# EAGLE board BigEasyDriver_GiantPanel_v16a (EAGLE 6.6.0), part 1 of 8
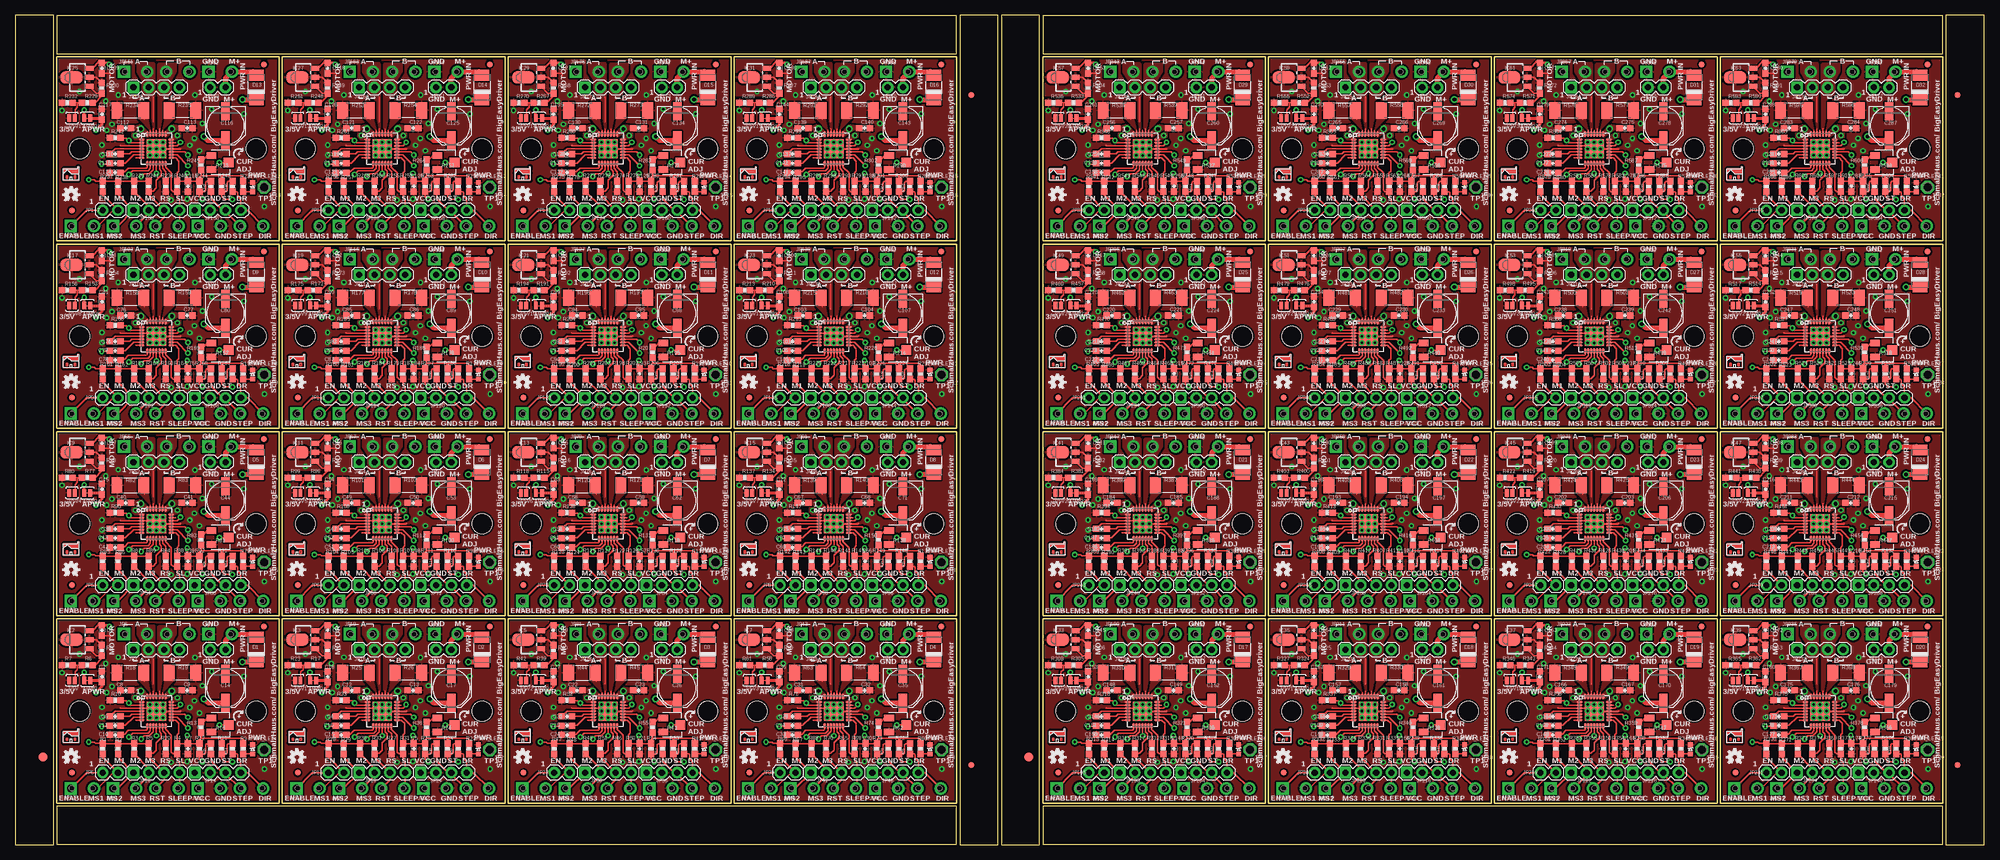
[diagram p0: board, top side]
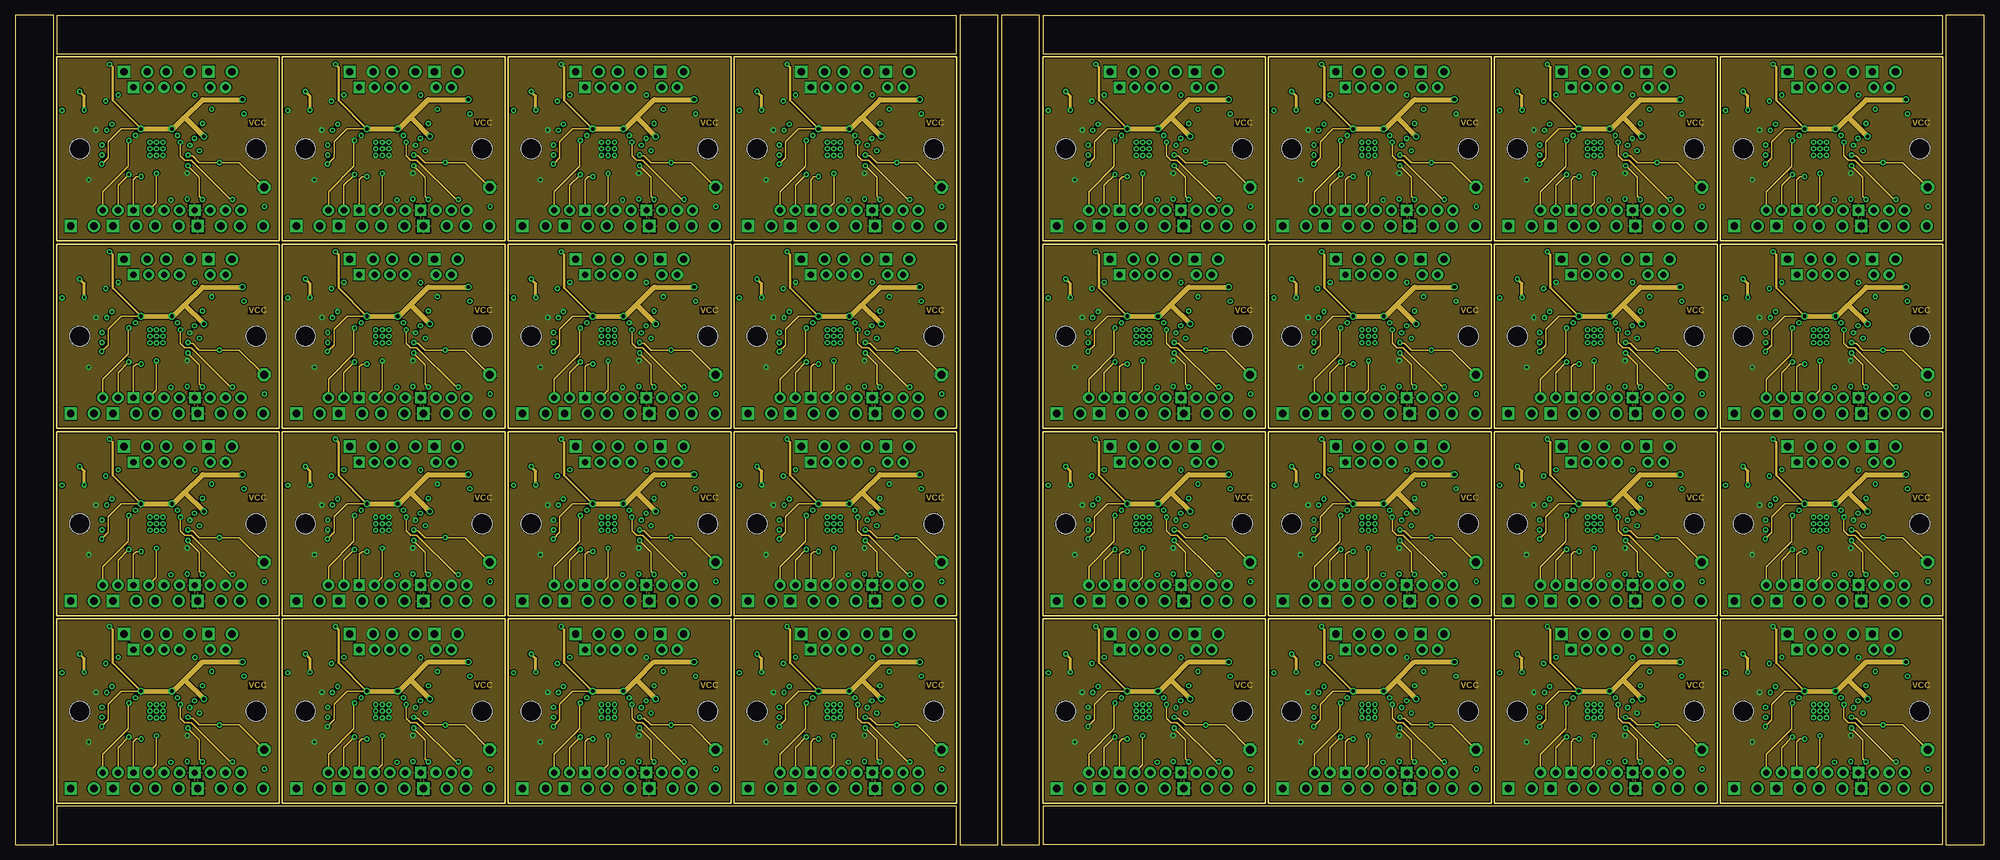
[diagram p1: board, inner layer VCC]
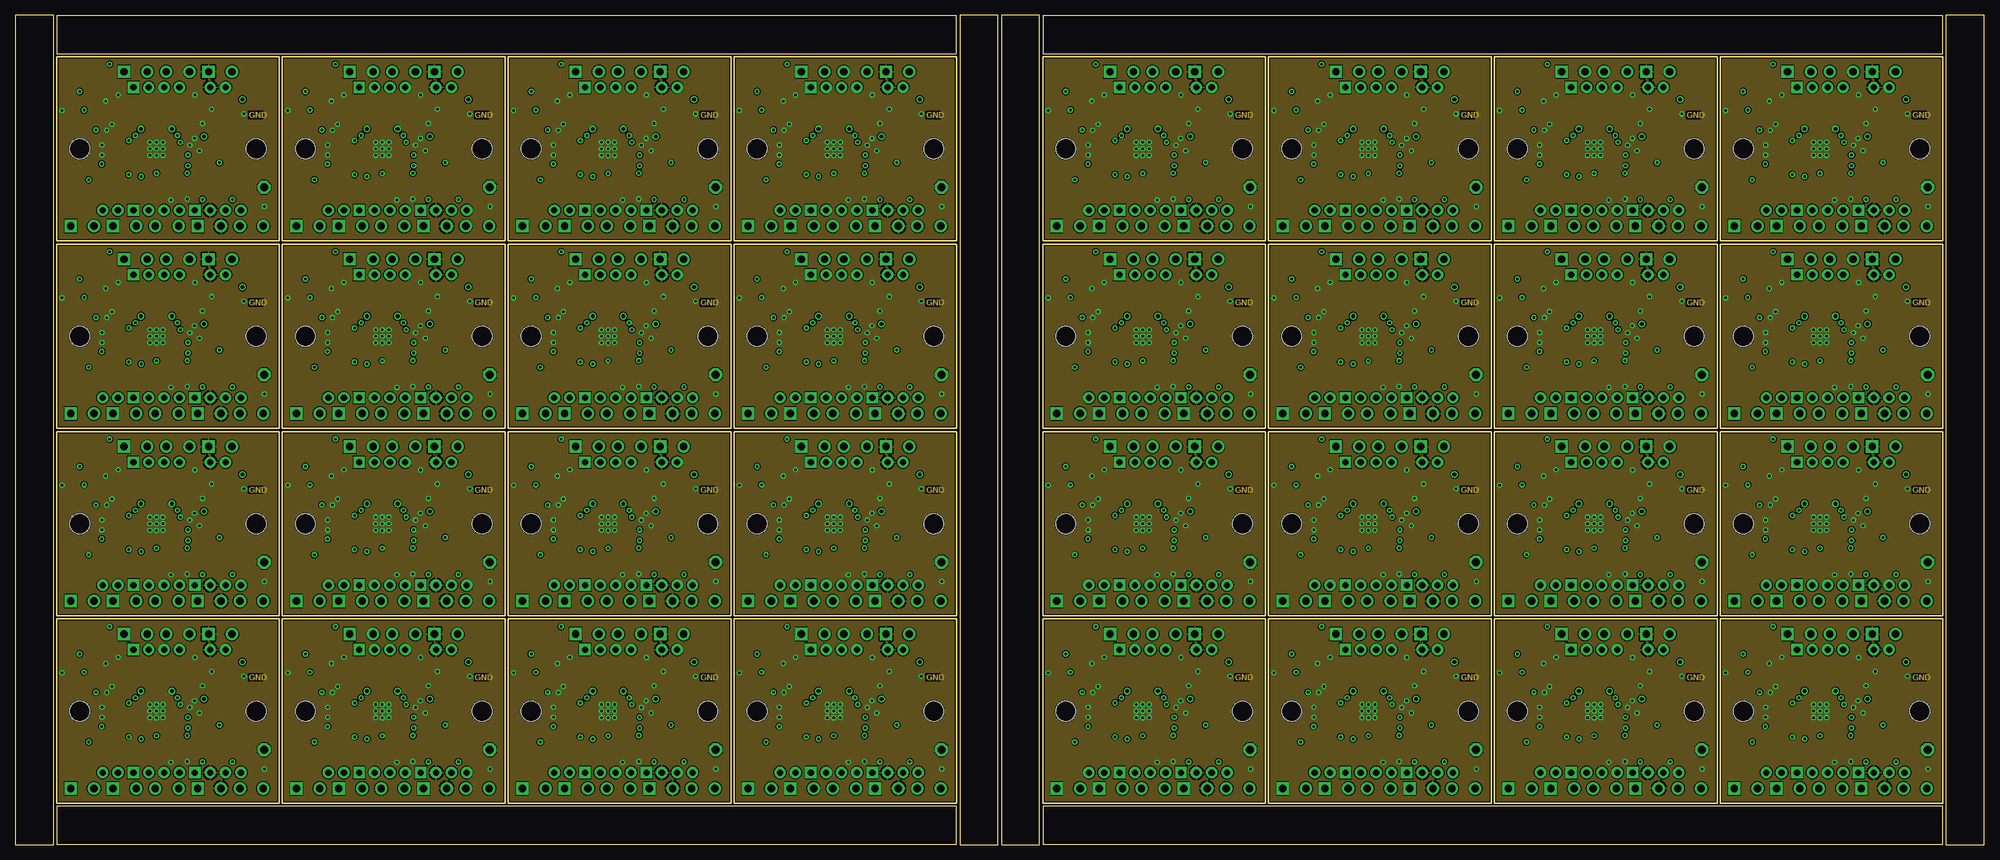
[diagram p2: board, inner layer GND]
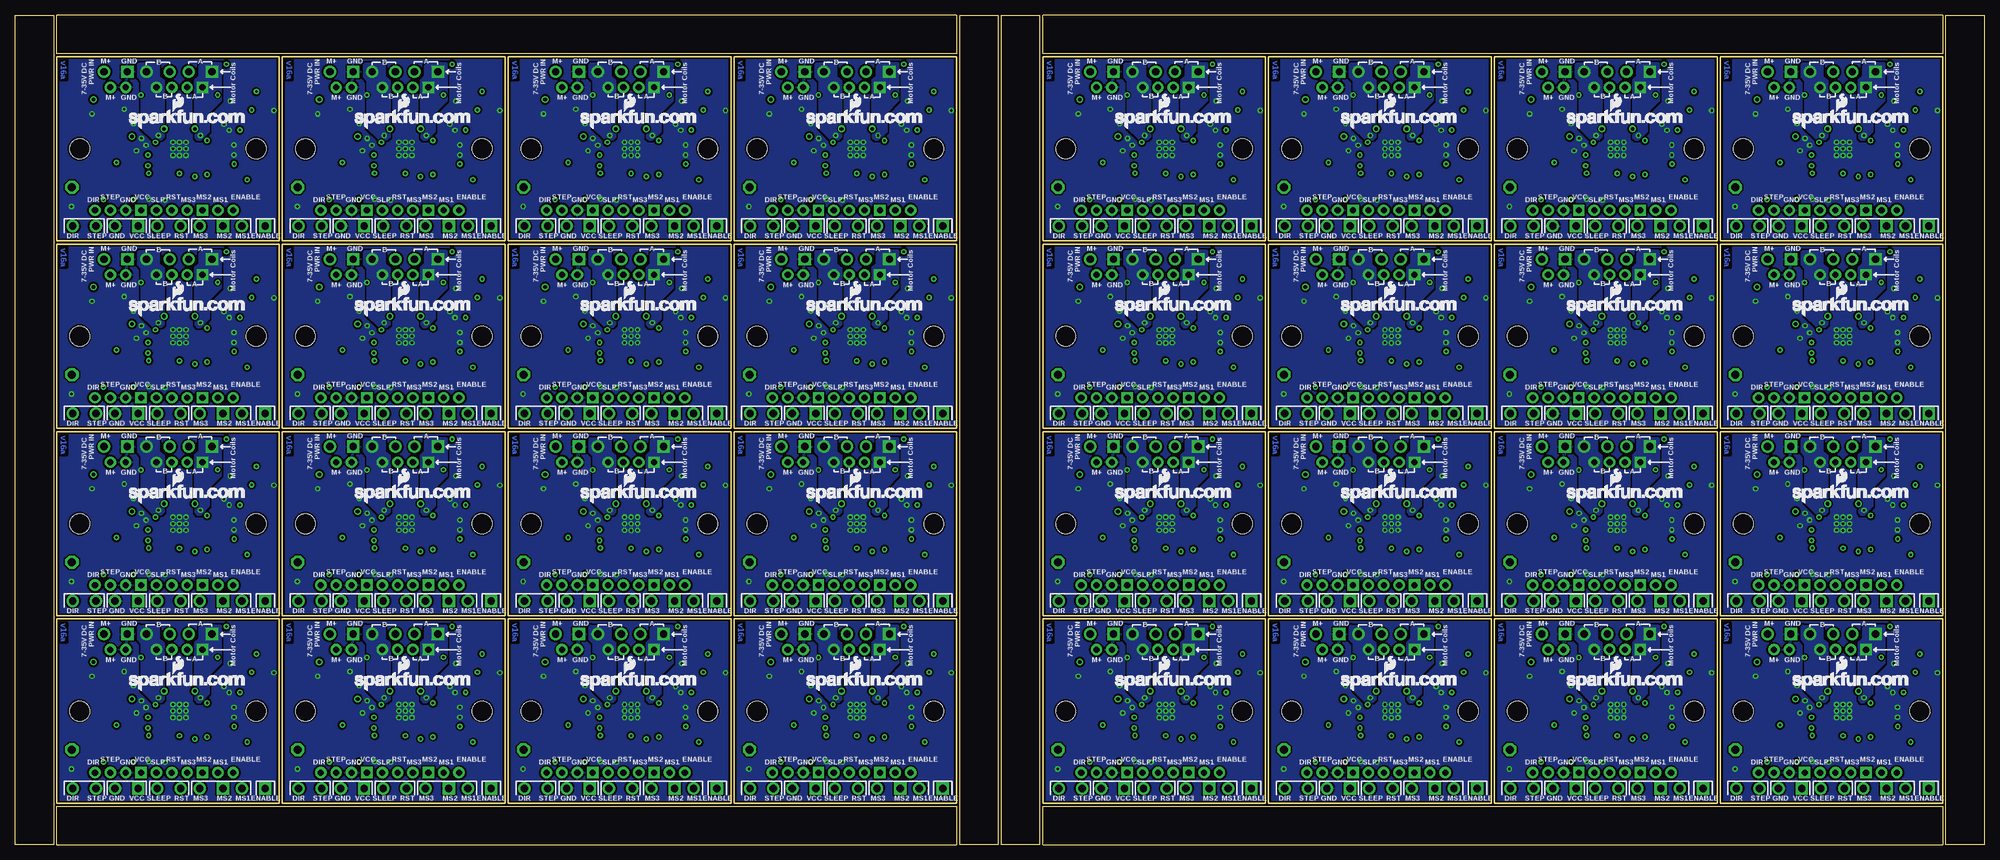
[diagram p3: board, bottom side, seen from below]

Size 325.63 x 137.16 mm. Coordinates in mm from the lower left corner, seen from the top.
Outline: 6.86,37.34 43.69,37.34 43.69,6.86 6.86,6.86 6.86,37.34
Outline: 44.2,37.34 81.03,37.34 81.03,6.86 44.2,6.86 44.2,37.34
Outline: 81.53,37.34 118.36,37.34 118.36,6.86 81.53,6.86 81.53,37.34
Outline: 118.87,37.34 155.7,37.34 155.7,6.86 118.87,6.86 118.87,37.34
Outline: 6.86,68.33 43.69,68.33 43.69,37.85 6.86,37.85 6.86,68.33
Outline: 44.2,68.33 81.03,68.33 81.03,37.85 44.2,37.85 44.2,68.33
Outline: 81.53,68.33 118.36,68.33 118.36,37.85 81.53,37.85 81.53,68.33
Outline: 118.87,68.33 155.7,68.33 155.7,37.85 118.87,37.85 118.87,68.33
Outline: 6.86,99.31 43.69,99.31 43.69,68.83 6.86,68.83 6.86,99.31
Outline: 44.2,99.31 81.03,99.31 81.03,68.83 44.2,68.83 44.2,99.31
Outline: 81.53,99.31 118.36,99.31 118.36,68.83 81.53,68.83 81.53,99.31
Outline: 118.87,99.31 155.7,99.31 155.7,68.83 118.87,68.83 118.87,99.31
Outline: 6.86,130.3 43.69,130.3 43.69,99.82 6.86,99.82 6.86,130.3
Outline: 44.2,130.3 81.03,130.3 81.03,99.82 44.2,99.82 44.2,130.3
Outline: 81.53,130.3 118.36,130.3 118.36,99.82 81.53,99.82 81.53,130.3
Outline: 118.87,130.3 155.7,130.3 155.7,99.82 118.87,99.82 118.87,130.3
Outline: 6.35,0 6.35,137.16 0,137.16 0,0 6.35,0
Outline: 6.86,6.35 6.86,0 155.7,0 155.7,6.35 6.86,6.35
Outline: 6.86,130.81 155.7,130.81 155.7,137.16 6.86,137.16 6.86,130.81
Outline: 156.21,137.16 156.21,0 162.56,0 162.56,137.16 156.21,137.16
Outline: 169.93,37.34 206.76,37.34 206.76,6.86 169.93,6.86 169.93,37.34
Outline: 207.26,37.34 244.09,37.34 244.09,6.86 207.26,6.86 207.26,37.34
Outline: 244.6,37.34 281.43,37.34 281.43,6.86 244.6,6.86 244.6,37.34
Outline: 281.94,37.34 318.77,37.34 318.77,6.86 281.94,6.86 281.94,37.34
Outline: 169.93,68.33 206.76,68.33 206.76,37.85 169.93,37.85 169.93,68.33
Outline: 207.26,68.33 244.09,68.33 244.09,37.85 207.26,37.85 207.26,68.33
Outline: 244.6,68.33 281.43,68.33 281.43,37.85 244.6,37.85 244.6,68.33
Outline: 281.94,68.33 318.77,68.33 318.77,37.85 281.94,37.85 281.94,68.33
Outline: 169.93,99.31 206.76,99.31 206.76,68.83 169.93,68.83 169.93,99.31
Outline: 207.26,99.31 244.09,99.31 244.09,68.83 207.26,68.83 207.26,99.31
Outline: 244.6,99.31 281.43,99.31 281.43,68.83 244.6,68.83 244.6,99.31
Outline: 281.94,99.31 318.77,99.31 318.77,68.83 281.94,68.83 281.94,99.31
Outline: 169.93,130.3 206.76,130.3 206.76,99.82 169.93,99.82 169.93,130.3
Outline: 207.26,130.3 244.09,130.3 244.09,99.82 207.26,99.82 207.26,130.3
Outline: 244.6,130.3 281.43,130.3 281.43,99.82 244.6,99.82 244.6,130.3
Outline: 281.94,130.3 318.77,130.3 318.77,99.82 281.94,99.82 281.94,130.3
Outline: 169.42,0 169.42,137.16 163.07,137.16 163.07,0 169.42,0
Outline: 169.93,6.35 169.93,0 318.77,0 318.77,6.35 169.93,6.35
Outline: 169.93,130.81 318.77,130.81 318.77,137.16 169.93,137.16 169.93,130.81
Outline: 319.28,137.16 319.28,0 325.63,0 325.63,137.16 319.28,137.16
Copper layers (1*2*15*16): Top 0.035mm / dielectric 1.5mm / VCC 0.035mm / dielectric 0.15mm / GND 0.035mm / dielectric 0.2mm / Bottom 0.035mm
Design rules "SparkFun-4-layer": minimum track width 6mil, minimum drill 13mil, track to track 6mil, track to pad 6mil, pad to pad 6mil, via to via 6mil, smd to smd 6mil, copper to edge 6mil, drill to drill 8mil, minimum pad ring 12mil, minimum via ring 10mil, stop-mask expansion 4mil, vias tented up to drill 20mil, thermal gap 12mil

## Footprints (pad centres in the part's own frame; a part is rotated, then mirrored left to right if it is on the bottom)
SJ_2S-NO = smd 0.635 x 1.27: 1 -0.45,0; 2 0.45,0
SJ_2S-TRACE = smd 0.635 x 1.27: 1 -0.508,0; 2 0.508,0
0603-CAP = smd 1.1 x 1: 1 -0.85,0; 2 0.85,0
PANASONIC_D = smd 3 x 1.4: + 2.4,0; - -2.4,0
DO-214AC = smd 1.8 x 2.4: A 2.025,0; C -2.025,0
FIDUCIAL-1.5X3 = smd 1.5 x 1.5: 1 0,0
FIDUCIAL-1X2 = smd 1 x 1: 1 0,0
QFN-28-5MM_ALT1 = smd 0.94 x 0.3: P$1 -2.44,1.5; P$2 -2.44,1; P$3 -2.44,0.5; P$4 -2.44,0; P$5 -2.44,-0.5; P$6 -2.44,-1; P$7 -2.44,-1.5; P$15 2.44,-1.5; P$16 2.44,-1; P$17 2.44,-0.5; P$18 2.44,0; P$19 2.44,0.5; P$20 2.44,1; P$21 2.44,1.5 | smd 0.3 x 0.94: P$8 -1.5,-2.44; P$9 -1,-2.44; P$10 -0.5,-2.44; P$11 0,-2.44; P$12 0.5,-2.44; P$13 1,-2.44; P$14 1.5,-2.44; P$22 1.5,2.44; P$23 1,2.44; P$24 0.5,2.44; P$25 0,2.44; P$26 -0.5,2.44; P$27 -1,2.44; P$28 -1.5,2.44 | smd 3.175 x 3.175: P$29 0,0
SCHMALZHAUS_SOT89 = smd 0.8 x 1.4: ADJ -1.499,-1.981; IN 1.499,-1.981; OUT 0,-1.98 | smd 2.032 x 3.65: OUT@1 0,0.94
1X02 = drill 1.016 pad 1.88: 1 0,0; 2 2.54,0
STAND-OFF = hole 3.302: 0,0
1X04 = drill 1.016 pad 1.88 square: 1 0,0 | drill 1.016 pad 1.88: 2 2.54,0; 3 5.08,0; 4 7.62,0
SCREWTERMINAL-3.5MM-4_LOCK = drill 1.2 pad 2.032 square: 1 -0.178,0 | drill 1.2 pad 2.032: 2 3.678,0; 3 6.822,0; 4 10.678,0
SCREWTERMINAL-3.5MM-2_LOCK = drill 1.2 pad 2.032 square: 1 -0.178,0 | drill 1.2 pad 2.032: 2 3.678,0
LED-0603 = smd 0.8 x 0.8: A 0,-0.75; C 0,0.75
0603-RES = smd 1.1 x 1: 1 -0.85,0; 2 0.85,0
TRIMPOT-3MM-2 = smd 1.092 x 1.6: 1 -1.155,-1.421; 3 1.155,-1.421 | smd 1.6 x 1.6: 2 0,1.421
R2010 = smd 1.8 x 2.7: 1 -2.2,0; 2 2.2,0
P1-13 = drill 1.321 pad 2.159 octagon: TP 0,0
PAD-0.008 = smd 0.203 x 0.203: P$1 0,0

## Placement (x,y rotation side)
3/5V  SOLDERJUMPERNO  [SJ_2S-NO]  9.4,27.18 180 top
3/5V1  SOLDERJUMPERNO  [SJ_2S-NO]  46.74,27.18 180 top
3/5V2  SOLDERJUMPERNO  [SJ_2S-NO]  84.07,27.18 180 top
3/5V3  SOLDERJUMPERNO  [SJ_2S-NO]  121.41,27.18 180 top
3/5V4  SOLDERJUMPERNO  [SJ_2S-NO]  9.4,58.17 180 top
3/5V5  SOLDERJUMPERNO  [SJ_2S-NO]  46.74,58.17 180 top
3/5V6  SOLDERJUMPERNO  [SJ_2S-NO]  84.07,58.17 180 top
3/5V7  SOLDERJUMPERNO  [SJ_2S-NO]  121.41,58.17 180 top
3/5V8  SOLDERJUMPERNO  [SJ_2S-NO]  9.4,89.15 180 top
3/5V9  SOLDERJUMPERNO  [SJ_2S-NO]  46.74,89.15 180 top
3/5V10  SOLDERJUMPERNO  [SJ_2S-NO]  84.07,89.15 180 top
3/5V11  SOLDERJUMPERNO  [SJ_2S-NO]  121.41,89.15 180 top
3/5V12  SOLDERJUMPERNO  [SJ_2S-NO]  9.4,120.14 180 top
3/5V13  SOLDERJUMPERNO  [SJ_2S-NO]  46.74,120.14 180 top
3/5V14  SOLDERJUMPERNO  [SJ_2S-NO]  84.07,120.14 180 top
3/5V15  SOLDERJUMPERNO  [SJ_2S-NO]  121.41,120.14 180 top
3/5V16  SOLDERJUMPERNO  [SJ_2S-NO]  172.47,27.18 180 top
3/5V17  SOLDERJUMPERNO  [SJ_2S-NO]  209.8,27.18 180 top
3/5V18  SOLDERJUMPERNO  [SJ_2S-NO]  247.14,27.18 180 top
3/5V19  SOLDERJUMPERNO  [SJ_2S-NO]  284.48,27.18 180 top
3/5V20  SOLDERJUMPERNO  [SJ_2S-NO]  172.47,58.17 180 top
3/5V21  SOLDERJUMPERNO  [SJ_2S-NO]  209.8,58.17 180 top
3/5V22  SOLDERJUMPERNO  [SJ_2S-NO]  247.14,58.17 180 top
3/5V23  SOLDERJUMPERNO  [SJ_2S-NO]  284.48,58.17 180 top
3/5V24  SOLDERJUMPERNO  [SJ_2S-NO]  172.47,89.15 180 top
3/5V25  SOLDERJUMPERNO  [SJ_2S-NO]  209.8,89.15 180 top
3/5V26  SOLDERJUMPERNO  [SJ_2S-NO]  247.14,89.15 180 top
3/5V27  SOLDERJUMPERNO  [SJ_2S-NO]  284.48,89.15 180 top
3/5V28  SOLDERJUMPERNO  [SJ_2S-NO]  172.47,120.14 180 top
3/5V29  SOLDERJUMPERNO  [SJ_2S-NO]  209.8,120.14 180 top
3/5V30  SOLDERJUMPERNO  [SJ_2S-NO]  247.14,120.14 180 top
3/5V31  SOLDERJUMPERNO  [SJ_2S-NO]  284.48,120.14 180 top
APWR  SOLDERJUMPERTRACE  [SJ_2S-TRACE]  11.94,27.18 0 top
APWR1  SOLDERJUMPERTRACE  [SJ_2S-TRACE]  49.28,27.18 0 top
APWR2  SOLDERJUMPERTRACE  [SJ_2S-TRACE]  86.61,27.18 0 top
APWR3  SOLDERJUMPERTRACE  [SJ_2S-TRACE]  123.95,27.18 0 top
APWR4  SOLDERJUMPERTRACE  [SJ_2S-TRACE]  11.94,58.17 0 top
APWR5  SOLDERJUMPERTRACE  [SJ_2S-TRACE]  49.28,58.17 0 top
APWR6  SOLDERJUMPERTRACE  [SJ_2S-TRACE]  86.61,58.17 0 top
APWR7  SOLDERJUMPERTRACE  [SJ_2S-TRACE]  123.95,58.17 0 top
APWR8  SOLDERJUMPERTRACE  [SJ_2S-TRACE]  11.94,89.15 0 top
APWR9  SOLDERJUMPERTRACE  [SJ_2S-TRACE]  49.28,89.15 0 top
APWR10  SOLDERJUMPERTRACE  [SJ_2S-TRACE]  86.61,89.15 0 top
APWR11  SOLDERJUMPERTRACE  [SJ_2S-TRACE]  123.95,89.15 0 top
APWR12  SOLDERJUMPERTRACE  [SJ_2S-TRACE]  11.94,120.14 0 top
APWR13  SOLDERJUMPERTRACE  [SJ_2S-TRACE]  49.28,120.14 0 top
APWR14  SOLDERJUMPERTRACE  [SJ_2S-TRACE]  86.61,120.14 0 top
APWR15  SOLDERJUMPERTRACE  [SJ_2S-TRACE]  123.95,120.14 0 top
APWR16  SOLDERJUMPERTRACE  [SJ_2S-TRACE]  175.01,27.18 0 top
APWR17  SOLDERJUMPERTRACE  [SJ_2S-TRACE]  212.34,27.18 0 top
APWR18  SOLDERJUMPERTRACE  [SJ_2S-TRACE]  249.68,27.18 0 top
APWR19  SOLDERJUMPERTRACE  [SJ_2S-TRACE]  287.02,27.18 0 top
APWR20  SOLDERJUMPERTRACE  [SJ_2S-TRACE]  175.01,58.17 0 top
APWR21  SOLDERJUMPERTRACE  [SJ_2S-TRACE]  212.34,58.17 0 top
APWR22  SOLDERJUMPERTRACE  [SJ_2S-TRACE]  249.68,58.17 0 top
APWR23  SOLDERJUMPERTRACE  [SJ_2S-TRACE]  287.02,58.17 0 top
APWR24  SOLDERJUMPERTRACE  [SJ_2S-TRACE]  175.01,89.15 0 top
APWR25  SOLDERJUMPERTRACE  [SJ_2S-TRACE]  212.34,89.15 0 top
APWR26  SOLDERJUMPERTRACE  [SJ_2S-TRACE]  249.68,89.15 0 top
APWR27  SOLDERJUMPERTRACE  [SJ_2S-TRACE]  287.02,89.15 0 top
APWR28  SOLDERJUMPERTRACE  [SJ_2S-TRACE]  175.01,120.14 0 top
APWR29  SOLDERJUMPERTRACE  [SJ_2S-TRACE]  212.34,120.14 0 top
APWR30  SOLDERJUMPERTRACE  [SJ_2S-TRACE]  249.68,120.14 0 top
APWR31  SOLDERJUMPERTRACE  [SJ_2S-TRACE]  287.02,120.14 0 top
C1  .1uF  [0603-CAP]  14.35,35.43 270 top
C2  1uF  [0603-CAP]  14.35,27.81 90 top
C3  .1uF  [0603-CAP]  51.69,35.43 270 top
C4  .1uf  [0603-CAP]  53.9,21.23 0 top
C5  .1uf  [0603-CAP]  65.91,15.88 270 top
C6  .1uf  [0603-CAP]  16.56,21.23 0 top
C7  .1uf  [0603-CAP]  28.57,15.88 270 top
C8  .1uf  [0603-CAP]  18.29,25.53 180 top
C9  .1uf  [0603-CAP]  28.45,25.53 0 top
C10  .22uF  [0603-CAP]  16.56,18.16 180 top
C11  .1uf  [0603-CAP]  16.56,19.71 180 top
C12  .1uf  [0603-CAP]  55.63,25.53 180 top
C13  .1uf  [0603-CAP]  65.79,25.53 0 top
C14  47uF  [PANASONIC_D]  34.8,25.91 270 top
C15  .22uF  [0603-CAP]  53.9,18.16 180 top
C16  .1uf  [0603-CAP]  53.9,19.71 180 top
C17  47uF  [PANASONIC_D]  72.14,25.91 270 top
C18  1uF  [0603-CAP]  51.69,27.81 90 top
C19  .1uF  [0603-CAP]  89.03,35.43 270 top
C20  .1uf  [0603-CAP]  91.24,21.23 0 top
C21  .1uf  [0603-CAP]  103.25,15.88 270 top
C22  .1uf  [0603-CAP]  92.96,25.53 180 top
C23  .1uf  [0603-CAP]  103.12,25.53 0 top
C24  .22uF  [0603-CAP]  91.24,18.16 180 top
C25  .1uf  [0603-CAP]  91.24,19.71 180 top
C26  47uF  [PANASONIC_D]  109.47,25.91 270 top
C27  1uF  [0603-CAP]  89.03,27.81 90 top
C28  .1uF  [0603-CAP]  126.36,35.43 270 top
C29  .1uf  [0603-CAP]  128.57,21.23 0 top
C30  .1uf  [0603-CAP]  140.59,15.88 270 top
C31  .1uf  [0603-CAP]  130.3,25.53 180 top
C32  .1uf  [0603-CAP]  140.46,25.53 0 top
C33  .22uF  [0603-CAP]  128.57,18.16 180 top
C34  .1uf  [0603-CAP]  128.57,19.71 180 top
C35  47uF  [PANASONIC_D]  146.81,25.91 270 top
C36  1uF  [0603-CAP]  126.36,27.81 90 top
C37  .1uF  [0603-CAP]  14.35,66.42 270 top
C38  .1uf  [0603-CAP]  16.56,52.22 0 top
C39  .1uf  [0603-CAP]  28.57,46.86 270 top
C40  .1uf  [0603-CAP]  18.29,56.52 180 top
C41  .1uf  [0603-CAP]  28.45,56.52 0 top
C42  .22uF  [0603-CAP]  16.56,49.15 180 top
C43  .1uf  [0603-CAP]  16.56,50.7 180 top
C44  47uF  [PANASONIC_D]  34.8,56.9 270 top
C45  1uF  [0603-CAP]  14.35,58.8 90 top
C46  .1uF  [0603-CAP]  51.69,66.42 270 top
C47  .1uf  [0603-CAP]  53.9,52.22 0 top
C48  .1uf  [0603-CAP]  65.91,46.86 270 top
C49  .1uf  [0603-CAP]  55.63,56.52 180 top
C50  .1uf  [0603-CAP]  65.79,56.52 0 top
C51  .22uF  [0603-CAP]  53.9,49.15 180 top
C52  .1uf  [0603-CAP]  53.9,50.7 180 top
C53  47uF  [PANASONIC_D]  72.14,56.9 270 top
C54  1uF  [0603-CAP]  51.69,58.8 90 top
C55  .1uF  [0603-CAP]  89.03,66.42 270 top
C56  .1uf  [0603-CAP]  91.24,52.22 0 top
C57  .1uf  [0603-CAP]  103.25,46.86 270 top
C58  .1uf  [0603-CAP]  92.96,56.52 180 top
C59  .1uf  [0603-CAP]  103.12,56.52 0 top
C60  .22uF  [0603-CAP]  91.24,49.15 180 top
C61  .1uf  [0603-CAP]  91.24,50.7 180 top
C62  47uF  [PANASONIC_D]  109.47,56.9 270 top
C63  1uF  [0603-CAP]  89.03,58.8 90 top
C64  .1uF  [0603-CAP]  126.36,66.42 270 top
C65  .1uf  [0603-CAP]  128.57,52.22 0 top
C66  .1uf  [0603-CAP]  140.59,46.86 270 top
C67  .1uf  [0603-CAP]  130.3,56.52 180 top
C68  .1uf  [0603-CAP]  140.46,56.52 0 top
C69  .22uF  [0603-CAP]  128.57,49.15 180 top
C70  .1uf  [0603-CAP]  128.57,50.7 180 top
C71  47uF  [PANASONIC_D]  146.81,56.9 270 top
C72  1uF  [0603-CAP]  126.36,58.8 90 top
C73  .1uF  [0603-CAP]  14.35,97.41 270 top
C74  .1uf  [0603-CAP]  16.56,83.21 0 top
C75  .1uf  [0603-CAP]  28.57,77.85 270 top
C76  .1uf  [0603-CAP]  18.29,87.5 180 top
C77  .1uf  [0603-CAP]  28.45,87.5 0 top
C78  .22uF  [0603-CAP]  16.56,80.14 180 top
C79  .1uf  [0603-CAP]  16.56,81.69 180 top
C80  47uF  [PANASONIC_D]  34.8,87.88 270 top
C81  1uF  [0603-CAP]  14.35,89.79 90 top
C82  .1uF  [0603-CAP]  51.69,97.41 270 top
C83  .1uf  [0603-CAP]  53.9,83.21 0 top
C84  .1uf  [0603-CAP]  65.91,77.85 270 top
C85  .1uf  [0603-CAP]  55.63,87.5 180 top
C86  .1uf  [0603-CAP]  65.79,87.5 0 top
C87  .22uF  [0603-CAP]  53.9,80.14 180 top
C88  .1uf  [0603-CAP]  53.9,81.69 180 top
C89  47uF  [PANASONIC_D]  72.14,87.88 270 top
C90  1uF  [0603-CAP]  51.69,89.79 90 top
C91  .1uF  [0603-CAP]  89.03,97.41 270 top
C92  .1uf  [0603-CAP]  91.24,83.21 0 top
C93  .1uf  [0603-CAP]  103.25,77.85 270 top
C94  .1uf  [0603-CAP]  92.96,87.5 180 top
C95  .1uf  [0603-CAP]  103.12,87.5 0 top
C96  .22uF  [0603-CAP]  91.24,80.14 180 top
C97  .1uf  [0603-CAP]  91.24,81.69 180 top
C98  47uF  [PANASONIC_D]  109.47,87.88 270 top
C99  1uF  [0603-CAP]  89.03,89.79 90 top
C100  .1uF  [0603-CAP]  126.36,97.41 270 top
C101  .1uf  [0603-CAP]  128.57,83.21 0 top
C102  .1uf  [0603-CAP]  140.59,77.85 270 top
C103  .1uf  [0603-CAP]  130.3,87.5 180 top
C104  .1uf  [0603-CAP]  140.46,87.5 0 top
C105  .22uF  [0603-CAP]  128.57,80.14 180 top
C106  .1uf  [0603-CAP]  128.57,81.69 180 top
C107  47uF  [PANASONIC_D]  146.81,87.88 270 top
C108  1uF  [0603-CAP]  126.36,89.79 90 top
C109  .1uF  [0603-CAP]  14.35,128.4 270 top
C110  .1uf  [0603-CAP]  16.56,114.2 0 top
C111  .1uf  [0603-CAP]  28.57,108.84 270 top
C112  .1uf  [0603-CAP]  18.29,118.49 180 top
C113  .1uf  [0603-CAP]  28.45,118.49 0 top
C114  .22uF  [0603-CAP]  16.56,111.12 180 top
C115  .1uf  [0603-CAP]  16.56,112.67 180 top
C116  47uF  [PANASONIC_D]  34.8,118.87 270 top
C117  1uF  [0603-CAP]  14.35,120.78 90 top
C118  .1uF  [0603-CAP]  51.69,128.4 270 top
C119  .1uf  [0603-CAP]  53.9,114.2 0 top
C120  .1uf  [0603-CAP]  65.91,108.84 270 top
C121  .1uf  [0603-CAP]  55.63,118.49 180 top
C122  .1uf  [0603-CAP]  65.79,118.49 0 top
C123  .22uF  [0603-CAP]  53.9,111.12 180 top
C124  .1uf  [0603-CAP]  53.9,112.67 180 top
C125  47uF  [PANASONIC_D]  72.14,118.87 270 top
C126  1uF  [0603-CAP]  51.69,120.78 90 top
C127  .1uF  [0603-CAP]  89.03,128.4 270 top
C128  .1uf  [0603-CAP]  91.24,114.2 0 top
C129  .1uf  [0603-CAP]  103.25,108.84 270 top
C130  .1uf  [0603-CAP]  92.96,118.49 180 top
C131  .1uf  [0603-CAP]  103.12,118.49 0 top
C132  .22uF  [0603-CAP]  91.24,111.12 180 top
C133  .1uf  [0603-CAP]  91.24,112.67 180 top
C134  47uF  [PANASONIC_D]  109.47,118.87 270 top
C135  1uF  [0603-CAP]  89.03,120.78 90 top
C136  .1uF  [0603-CAP]  126.36,128.4 270 top
C137  .1uf  [0603-CAP]  128.57,114.2 0 top
C138  .1uf  [0603-CAP]  140.59,108.84 270 top
C139  .1uf  [0603-CAP]  130.3,118.49 180 top
C140  .1uf  [0603-CAP]  140.46,118.49 0 top
C141  .22uF  [0603-CAP]  128.57,111.12 180 top
C142  .1uf  [0603-CAP]  128.57,112.67 180 top
C143  47uF  [PANASONIC_D]  146.81,118.87 270 top
C144  1uF  [0603-CAP]  126.36,120.78 90 top
C145  .1uF  [0603-CAP]  177.42,35.43 270 top
C146  .1uf  [0603-CAP]  179.63,21.23 0 top
C147  .1uf  [0603-CAP]  191.64,15.88 270 top
C148  .1uf  [0603-CAP]  181.36,25.53 180 top
C149  .1uf  [0603-CAP]  191.52,25.53 0 top
C150  .22uF  [0603-CAP]  179.63,18.16 180 top
C151  .1uf  [0603-CAP]  179.63,19.71 180 top
C152  47uF  [PANASONIC_D]  197.87,25.91 270 top
C153  1uF  [0603-CAP]  177.42,27.81 90 top
C154  .1uF  [0603-CAP]  214.76,35.43 270 top
C155  .1uf  [0603-CAP]  216.97,21.23 0 top
C156  .1uf  [0603-CAP]  228.98,15.88 270 top
C157  .1uf  [0603-CAP]  218.69,25.53 180 top
C158  .1uf  [0603-CAP]  228.85,25.53 0 top
C159  .22uF  [0603-CAP]  216.97,18.16 180 top
C160  .1uf  [0603-CAP]  216.97,19.71 180 top
C161  47uF  [PANASONIC_D]  235.2,25.91 270 top
C162  1uF  [0603-CAP]  214.76,27.81 90 top
C163  .1uF  [0603-CAP]  252.09,35.43 270 top
C164  .1uf  [0603-CAP]  254.3,21.23 0 top
C165  .1uf  [0603-CAP]  266.32,15.88 270 top
C166  .1uf  [0603-CAP]  256.03,25.53 180 top
C167  .1uf  [0603-CAP]  266.19,25.53 0 top
C168  .22uF  [0603-CAP]  254.3,18.16 180 top
C169  .1uf  [0603-CAP]  254.3,19.71 180 top
C170  47uF  [PANASONIC_D]  272.54,25.91 270 top
C171  1uF  [0603-CAP]  252.09,27.81 90 top
C172  .1uF  [0603-CAP]  289.43,35.43 270 top
C173  .1uf  [0603-CAP]  291.64,21.23 0 top
C174  .1uf  [0603-CAP]  303.66,15.88 270 top
C175  .1uf  [0603-CAP]  293.37,25.53 180 top
C176  .1uf  [0603-CAP]  303.53,25.53 0 top
C177  .22uF  [0603-CAP]  291.64,18.16 180 top
C178  .1uf  [0603-CAP]  291.64,19.71 180 top
C179  47uF  [PANASONIC_D]  309.88,25.91 270 top
C180  1uF  [0603-CAP]  289.43,27.81 90 top
C181  .1uF  [0603-CAP]  177.42,66.42 270 top
C182  .1uf  [0603-CAP]  179.63,52.22 0 top
C183  .1uf  [0603-CAP]  191.64,46.86 270 top
C184  .1uf  [0603-CAP]  181.36,56.52 180 top
C185  .1uf  [0603-CAP]  191.52,56.52 0 top
C186  .22uF  [0603-CAP]  179.63,49.15 180 top
C187  .1uf  [0603-CAP]  179.63,50.7 180 top
C188  47uF  [PANASONIC_D]  197.87,56.9 270 top
C189  1uF  [0603-CAP]  177.42,58.8 90 top
C190  .1uF  [0603-CAP]  214.76,66.42 270 top
C191  .1uf  [0603-CAP]  216.97,52.22 0 top
C192  .1uf  [0603-CAP]  228.98,46.86 270 top
C193  .1uf  [0603-CAP]  218.69,56.52 180 top
C194  .1uf  [0603-CAP]  228.85,56.52 0 top
C195  .22uF  [0603-CAP]  216.97,49.15 180 top
C196  .1uf  [0603-CAP]  216.97,50.7 180 top
C197  47uF  [PANASONIC_D]  235.2,56.9 270 top
C198  1uF  [0603-CAP]  214.76,58.8 90 top
C199  .1uF  [0603-CAP]  252.09,66.42 270 top
C200  .1uf  [0603-CAP]  254.3,52.22 0 top
C201  .1uf  [0603-CAP]  266.32,46.86 270 top
C202  .1uf  [0603-CAP]  256.03,56.52 180 top
C203  .1uf  [0603-CAP]  266.19,56.52 0 top
C204  .22uF  [0603-CAP]  254.3,49.15 180 top
C205  .1uf  [0603-CAP]  254.3,50.7 180 top
C206  47uF  [PANASONIC_D]  272.54,56.9 270 top
C207  1uF  [0603-CAP]  252.09,58.8 90 top
C208  .1uF  [0603-CAP]  289.43,66.42 270 top
C209  .1uf  [0603-CAP]  291.64,52.22 0 top
C210  .1uf  [0603-CAP]  303.66,46.86 270 top
C211  .1uf  [0603-CAP]  293.37,56.52 180 top
C212  .1uf  [0603-CAP]  303.53,56.52 0 top
C213  .22uF  [0603-CAP]  291.64,49.15 180 top
C214  .1uf  [0603-CAP]  291.64,50.7 180 top
C215  47uF  [PANASONIC_D]  309.88,56.9 270 top
C216  1uF  [0603-CAP]  289.43,58.8 90 top
C217  .1uF  [0603-CAP]  177.42,97.41 270 top
C218  .1uf  [0603-CAP]  179.63,83.21 0 top
C219  .1uf  [0603-CAP]  191.64,77.85 270 top
C220  .1uf  [0603-CAP]  181.36,87.5 180 top
C221  .1uf  [0603-CAP]  191.52,87.5 0 top
C222  .22uF  [0603-CAP]  179.63,80.14 180 top
C223  .1uf  [0603-CAP]  179.63,81.69 180 top
C224  47uF  [PANASONIC_D]  197.87,87.88 270 top
C225  1uF  [0603-CAP]  177.42,89.79 90 top
C226  .1uF  [0603-CAP]  214.76,97.41 270 top
C227  .1uf  [0603-CAP]  216.97,83.21 0 top
C228  .1uf  [0603-CAP]  228.98,77.85 270 top
C229  .1uf  [0603-CAP]  218.69,87.5 180 top
C230  .1uf  [0603-CAP]  228.85,87.5 0 top
C231  .22uF  [0603-CAP]  216.97,80.14 180 top
C232  .1uf  [0603-CAP]  216.97,81.69 180 top
C233  47uF  [PANASONIC_D]  235.2,87.88 270 top
C234  1uF  [0603-CAP]  214.76,89.79 90 top
C235  .1uF  [0603-CAP]  252.09,97.41 270 top
C236  .1uf  [0603-CAP]  254.3,83.21 0 top
C237  .1uf  [0603-CAP]  266.32,77.85 270 top
C238  .1uf  [0603-CAP]  256.03,87.5 180 top
C239  .1uf  [0603-CAP]  266.19,87.5 0 top
C240  .22uF  [0603-CAP]  254.3,80.14 180 top
C241  .1uf  [0603-CAP]  254.3,81.69 180 top
C242  47uF  [PANASONIC_D]  272.54,87.88 270 top
C243  1uF  [0603-CAP]  252.09,89.79 90 top
C244  .1uF  [0603-CAP]  289.43,97.41 270 top
C245  .1uf  [0603-CAP]  291.64,83.21 0 top
C246  .1uf  [0603-CAP]  303.66,77.85 270 top
C247  .1uf  [0603-CAP]  293.37,87.5 180 top
C248  .1uf  [0603-CAP]  303.53,87.5 0 top
C249  .22uF  [0603-CAP]  291.64,80.14 180 top
C250  .1uf  [0603-CAP]  291.64,81.69 180 top
C251  47uF  [PANASONIC_D]  309.88,87.88 270 top
C252  1uF  [0603-CAP]  289.43,89.79 90 top
C253  .1uF  [0603-CAP]  177.42,128.4 270 top
C254  .1uf  [0603-CAP]  179.63,114.2 0 top
C255  .1uf  [0603-CAP]  191.64,108.84 270 top
C256  .1uf  [0603-CAP]  181.36,118.49 180 top
C257  .1uf  [0603-CAP]  191.52,118.49 0 top
C258  .22uF  [0603-CAP]  179.63,111.12 180 top
C259  .1uf  [0603-CAP]  179.63,112.67 180 top
C260  47uF  [PANASONIC_D]  197.87,118.87 270 top
C261  1uF  [0603-CAP]  177.42,120.78 90 top
C262  .1uF  [0603-CAP]  214.76,128.4 270 top
C263  .1uf  [0603-CAP]  216.97,114.2 0 top
C264  .1uf  [0603-CAP]  228.98,108.84 270 top
C265  .1uf  [0603-CAP]  218.69,118.49 180 top
C266  .1uf  [0603-CAP]  228.85,118.49 0 top
C267  .22uF  [0603-CAP]  216.97,111.12 180 top
C268  .1uf  [0603-CAP]  216.97,112.67 180 top
C269  47uF  [PANASONIC_D]  235.2,118.87 270 top
C270  1uF  [0603-CAP]  214.76,120.78 90 top
C271  .1uF  [0603-CAP]  252.09,128.4 270 top
C272  .1uf  [0603-CAP]  254.3,114.2 0 top
C273  .1uf  [0603-CAP]  266.32,108.84 270 top
C274  .1uf  [0603-CAP]  256.03,118.49 180 top
C275  .1uf  [0603-CAP]  266.19,118.49 0 top
C276  .22uF  [0603-CAP]  254.3,111.12 180 top
C277  .1uf  [0603-CAP]  254.3,112.67 180 top
C278  47uF  [PANASONIC_D]  272.54,118.87 270 top
C279  1uF  [0603-CAP]  252.09,120.78 90 top
C280  .1uF  [0603-CAP]  289.43,128.4 270 top
C281  .1uf  [0603-CAP]  291.64,114.2 0 top
C282  .1uf  [0603-CAP]  303.66,108.84 270 top
C283  .1uf  [0603-CAP]  293.37,118.49 180 top
C284  .1uf  [0603-CAP]  303.53,118.49 0 top
C285  .22uF  [0603-CAP]  291.64,111.12 180 top
C286  .1uf  [0603-CAP]  291.64,112.67 180 top
C287  47uF  [PANASONIC_D]  309.88,118.87 270 top
C288  1uF  [0603-CAP]  289.43,120.78 90 top
D1  B340A-13-F  [DO-214AC]  39.88,32.26 90 top
D2  B340A-13-F  [DO-214AC]  77.22,32.26 90 top
D3  B340A-13-F  [DO-214AC]  114.55,32.26 90 top
D4  B340A-13-F  [DO-214AC]  151.89,32.26 90 top
D5  B340A-13-F  [DO-214AC]  39.88,63.25 90 top
D6  B340A-13-F  [DO-214AC]  77.22,63.25 90 top
D7  B340A-13-F  [DO-214AC]  114.55,63.25 90 top
D8  B340A-13-F  [DO-214AC]  151.89,63.25 90 top
D9  B340A-13-F  [DO-214AC]  39.88,94.23 90 top
D10  B340A-13-F  [DO-214AC]  77.22,94.23 90 top
D11  B340A-13-F  [DO-214AC]  114.55,94.23 90 top
D12  B340A-13-F  [DO-214AC]  151.89,94.23 90 top
D13  B340A-13-F  [DO-214AC]  39.88,125.22 90 top
D14  B340A-13-F  [DO-214AC]  77.22,125.22 90 top
D15  B340A-13-F  [DO-214AC]  114.55,125.22 90 top
D16  B340A-13-F  [DO-214AC]  151.89,125.22 90 top
D17  B340A-13-F  [DO-214AC]  202.95,32.26 90 top
D18  B340A-13-F  [DO-214AC]  240.28,32.26 90 top
D19  B340A-13-F  [DO-214AC]  277.62,32.26 90 top
D20  B340A-13-F  [DO-214AC]  314.96,32.26 90 top
D21  B340A-13-F  [DO-214AC]  202.95,63.25 90 top
D22  B340A-13-F  [DO-214AC]  240.28,63.25 90 top
D23  B340A-13-F  [DO-214AC]  277.62,63.25 90 top
D24  B340A-13-F  [DO-214AC]  314.96,63.25 90 top
D25  B340A-13-F  [DO-214AC]  202.95,94.23 90 top
D26  B340A-13-F  [DO-214AC]  240.28,94.23 90 top
D27  B340A-13-F  [DO-214AC]  277.62,94.23 90 top
D28  B340A-13-F  [DO-214AC]  314.96,94.23 90 top
D29  B340A-13-F  [DO-214AC]  202.95,125.22 90 top
D30  B340A-13-F  [DO-214AC]  240.28,125.22 90 top
D31  B340A-13-F  [DO-214AC]  277.62,125.22 90 top
D32  B340A-13-F  [DO-214AC]  314.96,125.22 90 top
E$1  [FIDUCIAL-1.5X3]  4.57,14.48 0 top
E$2  [FIDUCIAL-1X2]  321.18,123.95 180 top
E$3  [FIDUCIAL-1X2]  321.18,13.21 0 top
E$4  [FIDUCIAL-1.5X3]  167.64,14.48 0 top
E$6  [FIDUCIAL-1X2]  158.12,123.95 180 top
E$7  [FIDUCIAL-1X2]  158.12,13.21 0 top
FID1  FIDUCIAL1X2  [FIDUCIAL-1X2]  9.4,11.94 0 top
FID2  FIDUCIAL1X2  [FIDUCIAL-1X2]  41.15,36.07 0 top
FID3  FIDUCIAL1X2  [FIDUCIAL-1X2]  46.74,11.94 0 top
FID4  FIDUCIAL1X2  [FIDUCIAL-1X2]  78.49,36.07 0 top
FID5  FIDUCIAL1X2  [FIDUCIAL-1X2]  84.07,11.94 0 top
FID6  FIDUCIAL1X2  [FIDUCIAL-1X2]  115.82,36.07 0 top
FID7  FIDUCIAL1X2  [FIDUCIAL-1X2]  121.41,11.94 0 top
FID8  FIDUCIAL1X2  [FIDUCIAL-1X2]  153.16,36.07 0 top
FID9  FIDUCIAL1X2  [FIDUCIAL-1X2]  9.4,42.93 0 top
FID10  FIDUCIAL1X2  [FIDUCIAL-1X2]  41.15,67.06 0 top
FID11  FIDUCIAL1X2  [FIDUCIAL-1X2]  46.74,42.93 0 top
FID12  FIDUCIAL1X2  [FIDUCIAL-1X2]  78.49,67.06 0 top
FID13  FIDUCIAL1X2  [FIDUCIAL-1X2]  84.07,42.93 0 top
FID14  FIDUCIAL1X2  [FIDUCIAL-1X2]  115.82,67.06 0 top
FID15  FIDUCIAL1X2  [FIDUCIAL-1X2]  121.41,42.93 0 top
FID16  FIDUCIAL1X2  [FIDUCIAL-1X2]  153.16,67.06 0 top
FID17  FIDUCIAL1X2  [FIDUCIAL-1X2]  9.4,73.91 0 top
FID18  FIDUCIAL1X2  [FIDUCIAL-1X2]  41.15,98.04 0 top
FID19  FIDUCIAL1X2  [FIDUCIAL-1X2]  46.74,73.91 0 top
FID20  FIDUCIAL1X2  [FIDUCIAL-1X2]  78.49,98.04 0 top
FID21  FIDUCIAL1X2  [FIDUCIAL-1X2]  84.07,73.91 0 top
FID22  FIDUCIAL1X2  [FIDUCIAL-1X2]  115.82,98.04 0 top
FID23  FIDUCIAL1X2  [FIDUCIAL-1X2]  121.41,73.91 0 top
FID24  FIDUCIAL1X2  [FIDUCIAL-1X2]  153.16,98.04 0 top
FID25  FIDUCIAL1X2  [FIDUCIAL-1X2]  9.4,104.9 0 top
FID26  FIDUCIAL1X2  [FIDUCIAL-1X2]  41.15,129.03 0 top
FID27  FIDUCIAL1X2  [FIDUCIAL-1X2]  46.74,104.9 0 top
FID28  FIDUCIAL1X2  [FIDUCIAL-1X2]  78.49,129.03 0 top
FID29  FIDUCIAL1X2  [FIDUCIAL-1X2]  84.07,104.9 0 top
FID30  FIDUCIAL1X2  [FIDUCIAL-1X2]  115.82,129.03 0 top
FID31  FIDUCIAL1X2  [FIDUCIAL-1X2]  121.41,104.9 0 top
FID32  FIDUCIAL1X2  [FIDUCIAL-1X2]  153.16,129.03 0 top
FID33  FIDUCIAL1X2  [FIDUCIAL-1X2]  172.47,11.94 0 top
FID34  FIDUCIAL1X2  [FIDUCIAL-1X2]  204.22,36.07 0 top
FID35  FIDUCIAL1X2  [FIDUCIAL-1X2]  209.8,11.94 0 top
FID36  FIDUCIAL1X2  [FIDUCIAL-1X2]  241.55,36.07 0 top
FID37  FIDUCIAL1X2  [FIDUCIAL-1X2]  247.14,11.94 0 top
FID38  FIDUCIAL1X2  [FIDUCIAL-1X2]  278.89,36.07 0 top
FID39  FIDUCIAL1X2  [FIDUCIAL-1X2]  284.48,11.94 0 top
FID40  FIDUCIAL1X2  [FIDUCIAL-1X2]  316.23,36.07 0 top
FID41  FIDUCIAL1X2  [FIDUCIAL-1X2]  172.47,42.93 0 top
FID42  FIDUCIAL1X2  [FIDUCIAL-1X2]  204.22,67.06 0 top
FID43  FIDUCIAL1X2  [FIDUCIAL-1X2]  209.8,42.93 0 top
FID44  FIDUCIAL1X2  [FIDUCIAL-1X2]  241.55,67.06 0 top
FID45  FIDUCIAL1X2  [FIDUCIAL-1X2]  247.14,42.93 0 top
FID46  FIDUCIAL1X2  [FIDUCIAL-1X2]  278.89,67.06 0 top
FID47  FIDUCIAL1X2  [FIDUCIAL-1X2]  284.48,42.93 0 top
FID48  FIDUCIAL1X2  [FIDUCIAL-1X2]  316.23,67.06 0 top
FID49  FIDUCIAL1X2  [FIDUCIAL-1X2]  172.47,73.91 0 top
FID50  FIDUCIAL1X2  [FIDUCIAL-1X2]  204.22,98.04 0 top
FID51  FIDUCIAL1X2  [FIDUCIAL-1X2]  209.8,73.91 0 top
FID52  FIDUCIAL1X2  [FIDUCIAL-1X2]  241.55,98.04 0 top
FID53  FIDUCIAL1X2  [FIDUCIAL-1X2]  247.14,73.91 0 top
FID54  FIDUCIAL1X2  [FIDUCIAL-1X2]  278.89,98.04 0 top
FID55  FIDUCIAL1X2  [FIDUCIAL-1X2]  284.48,73.91 0 top
FID56  FIDUCIAL1X2  [FIDUCIAL-1X2]  316.23,98.04 0 top
FID57  FIDUCIAL1X2  [FIDUCIAL-1X2]  172.47,104.9 0 top
FID58  FIDUCIAL1X2  [FIDUCIAL-1X2]  204.22,129.03 0 top
FID59  FIDUCIAL1X2  [FIDUCIAL-1X2]  209.8,104.9 0 top
FID60  FIDUCIAL1X2  [FIDUCIAL-1X2]  241.55,129.03 0 top
FID61  FIDUCIAL1X2  [FIDUCIAL-1X2]  247.14,104.9 0 top
FID62  FIDUCIAL1X2  [FIDUCIAL-1X2]  278.89,129.03 0 top
FID63  FIDUCIAL1X2  [FIDUCIAL-1X2]  284.48,104.9 0 top
FID64  FIDUCIAL1X2  [FIDUCIAL-1X2]  316.23,129.03 0 top
IC1  A4983ALT1  [QFN-28-5MM_ALT1]  23.37,22.1 0 top
IC2  LM317L  [SCHMALZHAUS_SOT89]  10.29,33.91 90 top
IC3  LM317L  [SCHMALZHAUS_SOT89]  47.62,33.91 90 top
IC4  A4983ALT1  [QFN-28-5MM_ALT1]  60.71,22.1 0 top
IC5  LM317L  [SCHMALZHAUS_SOT89]  84.96,33.91 90 top
IC6  A4983ALT1  [QFN-28-5MM_ALT1]  98.04,22.1 0 top
IC7  LM317L  [SCHMALZHAUS_SOT89]  122.3,33.91 90 top
IC8  A4983ALT1  [QFN-28-5MM_ALT1]  135.38,22.1 0 top
IC9  LM317L  [SCHMALZHAUS_SOT89]  10.29,64.9 90 top
IC10  A4983ALT1  [QFN-28-5MM_ALT1]  23.37,53.09 0 top
IC11  LM317L  [SCHMALZHAUS_SOT89]  47.62,64.9 90 top
IC12  A4983ALT1  [QFN-28-5MM_ALT1]  60.71,53.09 0 top
IC13  LM317L  [SCHMALZHAUS_SOT89]  84.96,64.9 90 top
IC14  A4983ALT1  [QFN-28-5MM_ALT1]  98.04,53.09 0 top
IC15  LM317L  [SCHMALZHAUS_SOT89]  122.3,64.9 90 top
IC16  A4983ALT1  [QFN-28-5MM_ALT1]  135.38,53.09 0 top
IC17  LM317L  [SCHMALZHAUS_SOT89]  10.29,95.89 90 top
IC18  A4983ALT1  [QFN-28-5MM_ALT1]  23.37,84.07 0 top
IC19  LM317L  [SCHMALZHAUS_SOT89]  47.62,95.89 90 top
IC20  A4983ALT1  [QFN-28-5MM_ALT1]  60.71,84.07 0 top
IC21  LM317L  [SCHMALZHAUS_SOT89]  84.96,95.89 90 top
IC22  A4983ALT1  [QFN-28-5MM_ALT1]  98.04,84.07 0 top
IC23  LM317L  [SCHMALZHAUS_SOT89]  122.3,95.89 90 top
IC24  A4983ALT1  [QFN-28-5MM_ALT1]  135.38,84.07 0 top
IC25  LM317L  [SCHMALZHAUS_SOT89]  10.29,126.87 90 top
IC26  A4983ALT1  [QFN-28-5MM_ALT1]  23.37,115.06 0 top
IC27  LM317L  [SCHMALZHAUS_SOT89]  47.62,126.87 90 top
IC28  A4983ALT1  [QFN-28-5MM_ALT1]  60.71,115.06 0 top
IC29  LM317L  [SCHMALZHAUS_SOT89]  84.96,126.87 90 top
IC30  A4983ALT1  [QFN-28-5MM_ALT1]  98.04,115.06 0 top
IC31  LM317L  [SCHMALZHAUS_SOT89]  122.3,126.87 90 top
IC32  A4983ALT1  [QFN-28-5MM_ALT1]  135.38,115.06 0 top
IC33  LM317L  [SCHMALZHAUS_SOT89]  173.35,33.91 90 top
IC34  A4983ALT1  [QFN-28-5MM_ALT1]  186.44,22.1 0 top
IC35  LM317L  [SCHMALZHAUS_SOT89]  210.69,33.91 90 top
IC36  A4983ALT1  [QFN-28-5MM_ALT1]  223.77,22.1 0 top
IC37  LM317L  [SCHMALZHAUS_SOT89]  248.03,33.91 90 top
IC38  A4983ALT1  [QFN-28-5MM_ALT1]  261.11,22.1 0 top
IC39  LM317L  [SCHMALZHAUS_SOT89]  285.37,33.91 90 top
IC40  A4983ALT1  [QFN-28-5MM_ALT1]  298.45,22.1 0 top
IC41  LM317L  [SCHMALZHAUS_SOT89]  173.35,64.9 90 top
IC42  A4983ALT1  [QFN-28-5MM_ALT1]  186.44,53.09 0 top
IC43  LM317L  [SCHMALZHAUS_SOT89]  210.69,64.9 90 top
IC44  A4983ALT1  [QFN-28-5MM_ALT1]  223.77,53.09 0 top
IC45  LM317L  [SCHMALZHAUS_SOT89]  248.03,64.9 90 top
IC46  A4983ALT1  [QFN-28-5MM_ALT1]  261.11,53.09 0 top
IC47  LM317L  [SCHMALZHAUS_SOT89]  285.37,64.9 90 top
IC48  A4983ALT1  [QFN-28-5MM_ALT1]  298.45,53.09 0 top
IC49  LM317L  [SCHMALZHAUS_SOT89]  173.35,95.89 90 top
IC50  A4983ALT1  [QFN-28-5MM_ALT1]  186.44,84.07 0 top
IC51  LM317L  [SCHMALZHAUS_SOT89]  210.69,95.89 90 top
IC52  A4983ALT1  [QFN-28-5MM_ALT1]  223.77,84.07 0 top
IC53  LM317L  [SCHMALZHAUS_SOT89]  248.03,95.89 90 top
IC54  A4983ALT1  [QFN-28-5MM_ALT1]  261.11,84.07 0 top
IC55  LM317L  [SCHMALZHAUS_SOT89]  285.37,95.89 90 top
IC56  A4983ALT1  [QFN-28-5MM_ALT1]  298.45,84.07 0 top
IC57  LM317L  [SCHMALZHAUS_SOT89]  173.35,126.87 90 top
IC58  A4983ALT1  [QFN-28-5MM_ALT1]  186.44,115.06 0 top
IC59  LM317L  [SCHMALZHAUS_SOT89]  210.69,126.87 90 top
IC60  A4983ALT1  [QFN-28-5MM_ALT1]  223.77,115.06 0 top
IC61  LM317L  [SCHMALZHAUS_SOT89]  248.03,126.87 90 top
IC62  A4983ALT1  [QFN-28-5MM_ALT1]  261.11,115.06 0 top
IC63  LM317L  [SCHMALZHAUS_SOT89]  285.37,126.87 90 top
IC64  A4983ALT1  [QFN-28-5MM_ALT1]  298.45,115.06 0 top
JP1  [1X02]  32.26,32.26 0 top
JP2  STAND-OFF  [STAND-OFF]  48.01,22.1 0 top
JP3  [1X04]  19.56,32.26 0 top
JP4  STAND-OFF  [STAND-OFF]  77.22,22.1 0 top
JP5  [SCREWTERMINAL-3.5MM-4_LOCK]  18.17,34.84 0 top
JP6  [1X02]  14.48,11.94 0 top
JP7  [SCREWTERMINAL-3.5MM-2_LOCK]  32.17,34.84 0 top
JP8  STAND-OFF  [STAND-OFF]  10.67,22.1 0 top
JP9  STAND-OFF  [STAND-OFF]  39.88,22.1 0 top
JP10  [1X04]  19.56,11.94 0 top
JP11  [SCREWTERMINAL-3.5MM-4_LOCK]  16.36,9.32 0 top
JP12  [SCREWTERMINAL-3.5MM-4_LOCK]  30.36,9.32 0 top
JP13  [SCREWTERMINAL-3.5MM-2_LOCK]  9.36,9.32 0 top
JP14  [1X04]  29.72,11.94 0 top
JP15  [1X02]  51.82,11.94 0 top
JP16  [1X04]  56.9,32.26 0 top
JP17  [1X02]  69.6,32.26 0 top
JP18  [1X04]  56.9,11.94 0 top
JP19  [SCREWTERMINAL-3.5MM-4_LOCK]  55.51,34.84 0 top
JP20  [SCREWTERMINAL-3.5MM-2_LOCK]  69.51,34.84 0 top
JP21  [SCREWTERMINAL-3.5MM-4_LOCK]  53.7,9.32 0 top
JP22  [SCREWTERMINAL-3.5MM-4_LOCK]  67.7,9.32 0 top
JP23  [SCREWTERMINAL-3.5MM-2_LOCK]  46.7,9.32 0 top
JP24  [1X04]  67.06,11.94 0 top
JP25  STAND-OFF  [STAND-OFF]  85.34,22.1 0 top
JP26  STAND-OFF  [STAND-OFF]  114.55,22.1 0 top
JP27  [1X02]  89.15,11.94 0 top
JP28  [1X04]  94.23,32.26 0 top
JP29  [1X02]  106.93,32.26 0 top
JP30  [1X04]  94.23,11.94 0 top
JP31  [SCREWTERMINAL-3.5MM-4_LOCK]  92.84,34.84 0 top
JP32  [SCREWTERMINAL-3.5MM-2_LOCK]  106.84,34.84 0 top
JP33  [SCREWTERMINAL-3.5MM-4_LOCK]  91.03,9.32 0 top
JP34  [SCREWTERMINAL-3.5MM-4_LOCK]  105.03,9.32 0 top
JP35  [SCREWTERMINAL-3.5MM-2_LOCK]  84.03,9.32 0 top
JP36  [1X04]  104.39,11.94 0 top
JP37  STAND-OFF  [STAND-OFF]  122.68,22.1 0 top
JP38  STAND-OFF  [STAND-OFF]  151.89,22.1 0 top
JP39  [1X02]  126.49,11.94 0 top
JP40  [1X04]  131.57,32.26 0 top
JP41  [1X02]  144.27,32.26 0 top
JP42  [1X04]  131.57,11.94 0 top
JP43  [SCREWTERMINAL-3.5MM-4_LOCK]  130.18,34.84 0 top
JP44  [SCREWTERMINAL-3.5MM-2_LOCK]  144.18,34.84 0 top
JP45  [SCREWTERMINAL-3.5MM-4_LOCK]  128.37,9.32 0 top
JP46  [SCREWTERMINAL-3.5MM-4_LOCK]  142.37,9.32 0 top
JP47  [SCREWTERMINAL-3.5MM-2_LOCK]  121.37,9.32 0 top
JP48  [1X04]  141.73,11.94 0 top
JP49  STAND-OFF  [STAND-OFF]  10.67,53.09 0 top
JP50  STAND-OFF  [STAND-OFF]  39.88,53.09 0 top
JP51  [1X02]  14.48,42.93 0 top
JP52  [1X04]  19.56,63.25 0 top
JP53  [1X02]  32.26,63.25 0 top
JP54  [1X04]  19.56,42.93 0 top
JP55  [SCREWTERMINAL-3.5MM-4_LOCK]  18.17,65.83 0 top
JP56  [SCREWTERMINAL-3.5MM-2_LOCK]  32.17,65.83 0 top
JP57  [SCREWTERMINAL-3.5MM-4_LOCK]  16.36,40.31 0 top
JP58  [SCREWTERMINAL-3.5MM-4_LOCK]  30.36,40.31 0 top
JP59  [SCREWTERMINAL-3.5MM-2_LOCK]  9.36,40.31 0 top
JP60  [1X04]  29.72,42.93 0 top
JP61  STAND-OFF  [STAND-OFF]  48.01,53.09 0 top
JP62  STAND-OFF  [STAND-OFF]  77.22,53.09 0 top
JP63  [1X02]  51.82,42.93 0 top
JP64  [1X04]  56.9,63.25 0 top
JP65  [1X02]  69.6,63.25 0 top
JP66  [1X04]  56.9,42.93 0 top
JP67  [SCREWTERMINAL-3.5MM-4_LOCK]  55.51,65.83 0 top
JP68  [SCREWTERMINAL-3.5MM-2_LOCK]  69.51,65.83 0 top
JP69  [SCREWTERMINAL-3.5MM-4_LOCK]  53.7,40.31 0 top
JP70  [SCREWTERMINAL-3.5MM-4_LOCK]  67.7,40.31 0 top
JP71  [SCREWTERMINAL-3.5MM-2_LOCK]  46.7,40.31 0 top
JP72  [1X04]  67.06,42.93 0 top
JP73  STAND-OFF  [STAND-OFF]  85.34,53.09 0 top
JP74  STAND-OFF  [STAND-OFF]  114.55,53.09 0 top
JP75  [1X02]  89.15,42.93 0 top
JP76  [1X04]  94.23,63.25 0 top
JP77  [1X02]  106.93,63.25 0 top
JP78  [1X04]  94.23,42.93 0 top
JP79  [SCREWTERMINAL-3.5MM-4_LOCK]  92.84,65.83 0 top
JP80  [SCREWTERMINAL-3.5MM-2_LOCK]  106.84,65.83 0 top
JP81  [SCREWTERMINAL-3.5MM-4_LOCK]  91.03,40.31 0 top
JP82  [SCREWTERMINAL-3.5MM-4_LOCK]  105.03,40.31 0 top
JP83  [SCREWTERMINAL-3.5MM-2_LOCK]  84.03,40.31 0 top
JP84  [1X04]  104.39,42.93 0 top
JP85  STAND-OFF  [STAND-OFF]  122.68,53.09 0 top
JP86  STAND-OFF  [STAND-OFF]  151.89,53.09 0 top
JP87  [1X02]  126.49,42.93 0 top
JP88  [1X04]  131.57,63.25 0 top
JP89  [1X02]  144.27,63.25 0 top
JP90  [1X04]  131.57,42.93 0 top
JP91  [SCREWTERMINAL-3.5MM-4_LOCK]  130.18,65.83 0 top
JP92  [SCREWTERMINAL-3.5MM-2_LOCK]  144.18,65.83 0 top
JP93  [SCREWTERMINAL-3.5MM-4_LOCK]  128.37,40.31 0 top
JP94  [SCREWTERMINAL-3.5MM-4_LOCK]  142.37,40.31 0 top
JP95  [SCREWTERMINAL-3.5MM-2_LOCK]  121.37,40.31 0 top
JP96  [1X04]  141.73,42.93 0 top
JP97  STAND-OFF  [STAND-OFF]  10.67,84.07 0 top
JP98  STAND-OFF  [STAND-OFF]  39.88,84.07 0 top
JP99  [1X02]  14.48,73.91 0 top
JP100  [1X04]  19.56,94.23 0 top
JP101  [1X02]  32.26,94.23 0 top
JP102  [1X04]  19.56,73.91 0 top
JP103  [SCREWTERMINAL-3.5MM-4_LOCK]  18.17,96.81 0 top
JP104  [SCREWTERMINAL-3.5MM-2_LOCK]  32.17,96.81 0 top
JP105  [SCREWTERMINAL-3.5MM-4_LOCK]  16.36,71.29 0 top
JP106  [SCREWTERMINAL-3.5MM-4_LOCK]  30.36,71.29 0 top
JP107  [SCREWTERMINAL-3.5MM-2_LOCK]  9.36,71.29 0 top
JP108  [1X04]  29.72,73.91 0 top
JP109  STAND-OFF  [STAND-OFF]  48.01,84.07 0 top
JP110  STAND-OFF  [STAND-OFF]  77.22,84.07 0 top
JP111  [1X02]  51.82,73.91 0 top
JP112  [1X04]  56.9,94.23 0 top
JP113  [1X02]  69.6,94.23 0 top
JP114  [1X04]  56.9,73.91 0 top
JP115  [SCREWTERMINAL-3.5MM-4_LOCK]  55.51,96.81 0 top
JP116  [SCREWTERMINAL-3.5MM-2_LOCK]  69.51,96.81 0 top
JP117  [SCREWTERMINAL-3.5MM-4_LOCK]  53.7,71.29 0 top
JP118  [SCREWTERMINAL-3.5MM-4_LOCK]  67.7,71.29 0 top
JP119  [SCREWTERMINAL-3.5MM-2_LOCK]  46.7,71.29 0 top
JP120  [1X04]  67.06,73.91 0 top
JP121  STAND-OFF  [STAND-OFF]  85.34,84.07 0 top
JP122  STAND-OFF  [STAND-OFF]  114.55,84.07 0 top
JP123  [1X02]  89.15,73.91 0 top
JP124  [1X04]  94.23,94.23 0 top
JP125  [1X02]  106.93,94.23 0 top
JP126  [1X04]  94.23,73.91 0 top
JP127  [SCREWTERMINAL-3.5MM-4_LOCK]  92.84,96.81 0 top
JP128  [SCREWTERMINAL-3.5MM-2_LOCK]  106.84,96.81 0 top
JP129  [SCREWTERMINAL-3.5MM-4_LOCK]  91.03,71.29 0 top
JP130  [SCREWTERMINAL-3.5MM-4_LOCK]  105.03,71.29 0 top
JP131  [SCREWTERMINAL-3.5MM-2_LOCK]  84.03,71.29 0 top
JP132  [1X04]  104.39,73.91 0 top
JP133  STAND-OFF  [STAND-OFF]  122.68,84.07 0 top
JP134  STAND-OFF  [STAND-OFF]  151.89,84.07 0 top
JP135  [1X02]  126.49,73.91 0 top
JP136  [1X04]  131.57,94.23 0 top
JP137  [1X02]  144.27,94.23 0 top
JP138  [1X04]  131.57,73.91 0 top
JP139  [SCREWTERMINAL-3.5MM-4_LOCK]  130.18,96.81 0 top
JP140  [SCREWTERMINAL-3.5MM-2_LOCK]  144.18,96.81 0 top
JP141  [SCREWTERMINAL-3.5MM-4_LOCK]  128.37,71.29 0 top
JP142  [SCREWTERMINAL-3.5MM-4_LOCK]  142.37,71.29 0 top
JP143  [SCREWTERMINAL-3.5MM-2_LOCK]  121.37,71.29 0 top
JP144  [1X04]  141.73,73.91 0 top
JP145  STAND-OFF  [STAND-OFF]  10.67,115.06 0 top
JP146  STAND-OFF  [STAND-OFF]  39.88,115.06 0 top
JP147  [1X02]  14.48,104.9 0 top
JP148  [1X04]  19.56,125.22 0 top
JP149  [1X02]  32.26,125.22 0 top
JP150  [1X04]  19.56,104.9 0 top
JP151  [SCREWTERMINAL-3.5MM-4_LOCK]  18.17,127.8 0 top
JP152  [SCREWTERMINAL-3.5MM-2_LOCK]  32.17,127.8 0 top
JP153  [SCREWTERMINAL-3.5MM-4_LOCK]  16.36,102.28 0 top
JP154  [SCREWTERMINAL-3.5MM-4_LOCK]  30.36,102.28 0 top
JP155  [SCREWTERMINAL-3.5MM-2_LOCK]  9.36,102.28 0 top
JP156  [1X04]  29.72,104.9 0 top
JP157  STAND-OFF  [STAND-OFF]  48.01,115.06 0 top
JP158  STAND-OFF  [STAND-OFF]  77.22,115.06 0 top
JP159  [1X02]  51.82,104.9 0 top
JP160  [1X04]  56.9,125.22 0 top
JP161  [1X02]  69.6,125.22 0 top
JP162  [1X04]  56.9,104.9 0 top
JP163  [SCREWTERMINAL-3.5MM-4_LOCK]  55.51,127.8 0 top
JP164  [SCREWTERMINAL-3.5MM-2_LOCK]  69.51,127.8 0 top
JP165  [SCREWTERMINAL-3.5MM-4_LOCK]  53.7,102.28 0 top
JP166  [SCREWTERMINAL-3.5MM-4_LOCK]  67.7,102.28 0 top
JP167  [SCREWTERMINAL-3.5MM-2_LOCK]  46.7,102.28 0 top
JP168  [1X04]  67.06,104.9 0 top
JP169  STAND-OFF  [STAND-OFF]  85.34,115.06 0 top
JP170  STAND-OFF  [STAND-OFF]  114.55,115.06 0 top
JP171  [1X02]  89.15,104.9 0 top
JP172  [1X04]  94.23,125.22 0 top
JP173  [1X02]  106.93,125.22 0 top
JP174  [1X04]  94.23,104.9 0 top
JP175  [SCREWTERMINAL-3.5MM-4_LOCK]  92.84,127.8 0 top
JP176  [SCREWTERMINAL-3.5MM-2_LOCK]  106.84,127.8 0 top
JP177  [SCREWTERMINAL-3.5MM-4_LOCK]  91.03,102.28 0 top
JP178  [SCREWTERMINAL-3.5MM-4_LOCK]  105.03,102.28 0 top
JP179  [SCREWTERMINAL-3.5MM-2_LOCK]  84.03,102.28 0 top
JP180  [1X04]  104.39,104.9 0 top
JP181  STAND-OFF  [STAND-OFF]  122.68,115.06 0 top
JP182  STAND-OFF  [STAND-OFF]  151.89,115.06 0 top
JP183  [1X02]  126.49,104.9 0 top
JP184  [1X04]  131.57,125.22 0 top
JP185  [1X02]  144.27,125.22 0 top
JP186  [1X04]  131.57,104.9 0 top
JP187  [SCREWTERMINAL-3.5MM-4_LOCK]  130.18,127.8 0 top
JP188  [SCREWTERMINAL-3.5MM-2_LOCK]  144.18,127.8 0 top
JP189  [SCREWTERMINAL-3.5MM-4_LOCK]  128.37,102.28 0 top
JP190  [SCREWTERMINAL-3.5MM-4_LOCK]  142.37,102.28 0 top
JP191  [SCREWTERMINAL-3.5MM-2_LOCK]  121.37,102.28 0 top
JP192  [1X04]  141.73,104.9 0 top
JP193  STAND-OFF  [STAND-OFF]  173.74,22.1 0 top
JP194  STAND-OFF  [STAND-OFF]  202.95,22.1 0 top
JP195  [1X02]  177.55,11.94 0 top
JP196  [1X04]  182.63,32.26 0 top
JP197  [1X02]  195.33,32.26 0 top
JP198  [1X04]  182.63,11.94 0 top
JP199  [SCREWTERMINAL-3.5MM-4_LOCK]  181.24,34.84 0 top
JP200  [SCREWTERMINAL-3.5MM-2_LOCK]  195.24,34.84 0 top
JP201  [SCREWTERMINAL-3.5MM-4_LOCK]  179.43,9.32 0 top
JP202  [SCREWTERMINAL-3.5MM-4_LOCK]  193.43,9.32 0 top
JP203  [SCREWTERMINAL-3.5MM-2_LOCK]  172.43,9.32 0 top
JP204  [1X04]  192.79,11.94 0 top
JP205  STAND-OFF  [STAND-OFF]  211.07,22.1 0 top
JP206  STAND-OFF  [STAND-OFF]  240.28,22.1 0 top
JP207  [1X02]  214.88,11.94 0 top
JP208  [1X04]  219.96,32.26 0 top
JP209  [1X02]  232.66,32.26 0 top
JP210  [1X04]  219.96,11.94 0 top
JP211  [SCREWTERMINAL-3.5MM-4_LOCK]  218.57,34.84 0 top
JP212  [SCREWTERMINAL-3.5MM-2_LOCK]  232.57,34.84 0 top
JP213  [SCREWTERMINAL-3.5MM-4_LOCK]  216.76,9.32 0 top
JP214  [SCREWTERMINAL-3.5MM-4_LOCK]  230.76,9.32 0 top
JP215  [SCREWTERMINAL-3.5MM-2_LOCK]  209.76,9.32 0 top
JP216  [1X04]  230.12,11.94 0 top
JP217  STAND-OFF  [STAND-OFF]  248.41,22.1 0 top
JP218  STAND-OFF  [STAND-OFF]  277.62,22.1 0 top
JP219  [1X02]  252.22,11.94 0 top
JP220  [1X04]  257.3,32.26 0 top
JP221  [1X02]  270,32.26 0 top
JP222  [1X04]  257.3,11.94 0 top
JP223  [SCREWTERMINAL-3.5MM-4_LOCK]  255.91,34.84 0 top
JP224  [SCREWTERMINAL-3.5MM-2_LOCK]  269.91,34.84 0 top
JP225  [SCREWTERMINAL-3.5MM-4_LOCK]  254.1,9.32 0 top
JP226  [SCREWTERMINAL-3.5MM-4_LOCK]  268.1,9.32 0 top
JP227  [SCREWTERMINAL-3.5MM-2_LOCK]  247.1,9.32 0 top
JP228  [1X04]  267.46,11.94 0 top
JP229  STAND-OFF  [STAND-OFF]  285.75,22.1 0 top
JP230  STAND-OFF  [STAND-OFF]  314.96,22.1 0 top
JP231  [1X02]  289.56,11.94 0 top
JP232  [1X04]  294.64,32.26 0 top
JP233  [1X02]  307.34,32.26 0 top
JP234  [1X04]  294.64,11.94 0 top
JP235  [SCREWTERMINAL-3.5MM-4_LOCK]  293.25,34.84 0 top
JP236  [SCREWTERMINAL-3.5MM-2_LOCK]  307.25,34.84 0 top
JP237  [SCREWTERMINAL-3.5MM-4_LOCK]  291.44,9.32 0 top
JP238  [SCREWTERMINAL-3.5MM-4_LOCK]  305.44,9.32 0 top
JP239  [SCREWTERMINAL-3.5MM-2_LOCK]  284.44,9.32 0 top
JP240  [1X04]  304.8,11.94 0 top
JP241  STAND-OFF  [STAND-OFF]  173.74,53.09 0 top
JP242  STAND-OFF  [STAND-OFF]  202.95,53.09 0 top
JP243  [1X02]  177.55,42.93 0 top
JP244  [1X04]  182.63,63.25 0 top
JP245  [1X02]  195.33,63.25 0 top
JP246  [1X04]  182.63,42.93 0 top
JP247  [SCREWTERMINAL-3.5MM-4_LOCK]  181.24,65.83 0 top
JP248  [SCREWTERMINAL-3.5MM-2_LOCK]  195.24,65.83 0 top
JP249  [SCREWTERMINAL-3.5MM-4_LOCK]  179.43,40.31 0 top
JP250  [SCREWTERMINAL-3.5MM-4_LOCK]  193.43,40.31 0 top
JP251  [SCREWTERMINAL-3.5MM-2_LOCK]  172.43,40.31 0 top
JP252  [1X04]  192.79,42.93 0 top
JP253  STAND-OFF  [STAND-OFF]  211.07,53.09 0 top
JP254  STAND-OFF  [STAND-OFF]  240.28,53.09 0 top
JP255  [1X02]  214.88,42.93 0 top
JP256  [1X04]  219.96,63.25 0 top
JP257  [1X02]  232.66,63.25 0 top
JP258  [1X04]  219.96,42.93 0 top
JP259  [SCREWTERMINAL-3.5MM-4_LOCK]  218.57,65.83 0 top
JP260  [SCREWTERMINAL-3.5MM-2_LOCK]  232.57,65.83 0 top
JP261  [SCREWTERMINAL-3.5MM-4_LOCK]  216.76,40.31 0 top
JP262  [SCREWTERMINAL-3.5MM-4_LOCK]  230.76,40.31 0 top
JP263  [SCREWTERMINAL-3.5MM-2_LOCK]  209.76,40.31 0 top
JP264  [1X04]  230.12,42.93 0 top
JP265  STAND-OFF  [STAND-OFF]  248.41,53.09 0 top
JP266  STAND-OFF  [STAND-OFF]  277.62,53.09 0 top
JP267  [1X02]  252.22,42.93 0 top
JP268  [1X04]  257.3,63.25 0 top
JP269  [1X02]  270,63.25 0 top
JP270  [1X04]  257.3,42.93 0 top
JP271  [SCREWTERMINAL-3.5MM-4_LOCK]  255.91,65.83 0 top
JP272  [SCREWTERMINAL-3.5MM-2_LOCK]  269.91,65.83 0 top
JP273  [SCREWTERMINAL-3.5MM-4_LOCK]  254.1,40.31 0 top
JP274  [SCREWTERMINAL-3.5MM-4_LOCK]  268.1,40.31 0 top
JP275  [SCREWTERMINAL-3.5MM-2_LOCK]  247.1,40.31 0 top
JP276  [1X04]  267.46,42.93 0 top
JP277  STAND-OFF  [STAND-OFF]  285.75,53.09 0 top
JP278  STAND-OFF  [STAND-OFF]  314.96,53.09 0 top
JP279  [1X02]  289.56,42.93 0 top
JP280  [1X04]  294.64,63.25 0 top
JP281  [1X02]  307.34,63.25 0 top
JP282  [1X04]  294.64,42.93 0 top
JP283  [SCREWTERMINAL-3.5MM-4_LOCK]  293.25,65.83 0 top
JP284  [SCREWTERMINAL-3.5MM-2_LOCK]  307.25,65.83 0 top
JP285  [SCREWTERMINAL-3.5MM-4_LOCK]  291.44,40.31 0 top
JP286  [SCREWTERMINAL-3.5MM-4_LOCK]  305.44,40.31 0 top
JP287  [SCREWTERMINAL-3.5MM-2_LOCK]  284.44,40.31 0 top
JP288  [1X04]  304.8,42.93 0 top
JP289  STAND-OFF  [STAND-OFF]  173.74,84.07 0 top
JP290  STAND-OFF  [STAND-OFF]  202.95,84.07 0 top
JP291  [1X02]  177.55,73.91 0 top
JP292  [1X04]  182.63,94.23 0 top
JP293  [1X02]  195.33,94.23 0 top
JP294  [1X04]  182.63,73.91 0 top
JP295  [SCREWTERMINAL-3.5MM-4_LOCK]  181.24,96.81 0 top
JP296  [SCREWTERMINAL-3.5MM-2_LOCK]  195.24,96.81 0 top
JP297  [SCREWTERMINAL-3.5MM-4_LOCK]  179.43,71.29 0 top
JP298  [SCREWTERMINAL-3.5MM-4_LOCK]  193.43,71.29 0 top
JP299  [SCREWTERMINAL-3.5MM-2_LOCK]  172.43,71.29 0 top
JP300  [1X04]  192.79,73.91 0 top
JP301  STAND-OFF  [STAND-OFF]  211.07,84.07 0 top
JP302  STAND-OFF  [STAND-OFF]  240.28,84.07 0 top
JP303  [1X02]  214.88,73.91 0 top
JP304  [1X04]  219.96,94.23 0 top
JP305  [1X02]  232.66,94.23 0 top
JP306  [1X04]  219.96,73.91 0 top
JP307  [SCREWTERMINAL-3.5MM-4_LOCK]  218.57,96.81 0 top
JP308  [SCREWTERMINAL-3.5MM-2_LOCK]  232.57,96.81 0 top
JP309  [SCREWTERMINAL-3.5MM-4_LOCK]  216.76,71.29 0 top
JP310  [SCREWTERMINAL-3.5MM-4_LOCK]  230.76,71.29 0 top
JP311  [SCREWTERMINAL-3.5MM-2_LOCK]  209.76,71.29 0 top
JP312  [1X04]  230.12,73.91 0 top
JP313  STAND-OFF  [STAND-OFF]  248.41,84.07 0 top
JP314  STAND-OFF  [STAND-OFF]  277.62,84.07 0 top
JP315  [1X02]  252.22,73.91 0 top
JP316  [1X04]  257.3,94.23 0 top
JP317  [1X02]  270,94.23 0 top
JP318  [1X04]  257.3,73.91 0 top
JP319  [SCREWTERMINAL-3.5MM-4_LOCK]  255.91,96.81 0 top
JP320  [SCREWTERMINAL-3.5MM-2_LOCK]  269.91,96.81 0 top
JP321  [SCREWTERMINAL-3.5MM-4_LOCK]  254.1,71.29 0 top
JP322  [SCREWTERMINAL-3.5MM-4_LOCK]  268.1,71.29 0 top
JP323  [SCREWTERMINAL-3.5MM-2_LOCK]  247.1,71.29 0 top
JP324  [1X04]  267.46,73.91 0 top
JP325  STAND-OFF  [STAND-OFF]  285.75,84.07 0 top
JP326  STAND-OFF  [STAND-OFF]  314.96,84.07 0 top
JP327  [1X02]  289.56,73.91 0 top
JP328  [1X04]  294.64,94.23 0 top
JP329  [1X02]  307.34,94.23 0 top
JP330  [1X04]  294.64,73.91 0 top
JP331  [SCREWTERMINAL-3.5MM-4_LOCK]  293.25,96.81 0 top
JP332  [SCREWTERMINAL-3.5MM-2_LOCK]  307.25,96.81 0 top
JP333  [SCREWTERMINAL-3.5MM-4_LOCK]  291.44,71.29 0 top
JP334  [SCREWTERMINAL-3.5MM-4_LOCK]  305.44,71.29 0 top
JP335  [SCREWTERMINAL-3.5MM-2_LOCK]  284.44,71.29 0 top
JP336  [1X04]  304.8,73.91 0 top
JP337  STAND-OFF  [STAND-OFF]  173.74,115.06 0 top
JP338  STAND-OFF  [STAND-OFF]  202.95,115.06 0 top
JP339  [1X02]  177.55,104.9 0 top
JP340  [1X04]  182.63,125.22 0 top
JP341  [1X02]  195.33,125.22 0 top
JP342  [1X04]  182.63,104.9 0 top
JP343  [SCREWTERMINAL-3.5MM-4_LOCK]  181.24,127.8 0 top
JP344  [SCREWTERMINAL-3.5MM-2_LOCK]  195.24,127.8 0 top
JP345  [SCREWTERMINAL-3.5MM-4_LOCK]  179.43,102.28 0 top
JP346  [SCREWTERMINAL-3.5MM-4_LOCK]  193.43,102.28 0 top
JP347  [SCREWTERMINAL-3.5MM-2_LOCK]  172.43,102.28 0 top
JP348  [1X04]  192.79,104.9 0 top
JP349  STAND-OFF  [STAND-OFF]  211.07,115.06 0 top
JP350  STAND-OFF  [STAND-OFF]  240.28,115.06 0 top
JP351  [1X02]  214.88,104.9 0 top
JP352  [1X04]  219.96,125.22 0 top
JP353  [1X02]  232.66,125.22 0 top
JP354  [1X04]  219.96,104.9 0 top
JP355  [SCREWTERMINAL-3.5MM-4_LOCK]  218.57,127.8 0 top
JP356  [SCREWTERMINAL-3.5MM-2_LOCK]  232.57,127.8 0 top
JP357  [SCREWTERMINAL-3.5MM-4_LOCK]  216.76,102.28 0 top
JP358  [SCREWTERMINAL-3.5MM-4_LOCK]  230.76,102.28 0 top
JP359  [SCREWTERMINAL-3.5MM-2_LOCK]  209.76,102.28 0 top
JP360  [1X04]  230.12,104.9 0 top
JP361  STAND-OFF  [STAND-OFF]  248.41,115.06 0 top
JP362  STAND-OFF  [STAND-OFF]  277.62,115.06 0 top
JP363  [1X02]  252.22,104.9 0 top
JP364  [1X04]  257.3,125.22 0 top
JP365  [1X02]  270,125.22 0 top
JP366  [1X04]  257.3,104.9 0 top
JP367  [SCREWTERMINAL-3.5MM-4_LOCK]  255.91,127.8 0 top
JP368  [SCREWTERMINAL-3.5MM-2_LOCK]  269.91,127.8 0 top
JP369  [SCREWTERMINAL-3.5MM-4_LOCK]  254.1,102.28 0 top
JP370  [SCREWTERMINAL-3.5MM-4_LOCK]  268.1,102.28 0 top
JP371  [SCREWTERMINAL-3.5MM-2_LOCK]  247.1,102.28 0 top
JP372  [1X04]  267.46,104.9 0 top
JP373  STAND-OFF  [STAND-OFF]  285.75,115.06 0 top
JP374  STAND-OFF  [STAND-OFF]  314.96,115.06 0 top
JP375  [1X02]  289.56,104.9 0 top
JP376  [1X04]  294.64,125.22 0 top
JP377  [1X02]  307.34,125.22 0 top
JP378  [1X04]  294.64,104.9 0 top
JP379  [SCREWTERMINAL-3.5MM-4_LOCK]  293.25,127.8 0 top
JP380  [SCREWTERMINAL-3.5MM-2_LOCK]  307.25,127.8 0 top
JP381  [SCREWTERMINAL-3.5MM-4_LOCK]  291.44,102.28 0 top
JP382  [SCREWTERMINAL-3.5MM-4_LOCK]  305.44,102.28 0 top
JP383  [SCREWTERMINAL-3.5MM-2_LOCK]  284.44,102.28 0 top
JP384  [1X04]  304.8,104.9 0 top
LOGO1  OSHW_LOGO_FILLX0100-NT  [OSHW_FILLX100_NOTEXT]  7.85,13.39 0 top
LOGO2  OSHW_LOGO_FILLX0100-NT  [OSHW_FILLX100_NOTEXT]  45.19,13.39 0 top
LOGO3  OSHW_LOGO_FILLX0100-NT  [OSHW_FILLX100_NOTEXT]  82.52,13.39 0 top
LOGO4  OSHW_LOGO_FILLX0100-NT  [OSHW_FILLX100_NOTEXT]  119.86,13.39 0 top
LOGO5  OSHW_LOGO_FILLX0100-NT  [OSHW_FILLX100_NOTEXT]  7.85,44.37 0 top
LOGO6  OSHW_LOGO_FILLX0100-NT  [OSHW_FILLX100_NOTEXT]  45.19,44.37 0 top
LOGO7  OSHW_LOGO_FILLX0100-NT  [OSHW_FILLX100_NOTEXT]  82.52,44.37 0 top
LOGO8  OSHW_LOGO_FILLX0100-NT  [OSHW_FILLX100_NOTEXT]  119.86,44.37 0 top
LOGO9  OSHW_LOGO_FILLX0100-NT  [OSHW_FILLX100_NOTEXT]  7.85,75.36 0 top
LOGO10  OSHW_LOGO_FILLX0100-NT  [OSHW_FILLX100_NOTEXT]  45.19,75.36 0 top
LOGO11  OSHW_LOGO_FILLX0100-NT  [OSHW_FILLX100_NOTEXT]  82.52,75.36 0 top
LOGO12  OSHW_LOGO_FILLX0100-NT  [OSHW_FILLX100_NOTEXT]  119.86,75.36 0 top
LOGO13  OSHW_LOGO_FILLX0100-NT  [OSHW_FILLX100_NOTEXT]  7.85,106.35 0 top
LOGO14  OSHW_LOGO_FILLX0100-NT  [OSHW_FILLX100_NOTEXT]  45.19,106.35 0 top
LOGO15  OSHW_LOGO_FILLX0100-NT  [OSHW_FILLX100_NOTEXT]  82.52,106.35 0 top
LOGO16  OSHW_LOGO_FILLX0100-NT  [OSHW_FILLX100_NOTEXT]  119.86,106.35 0 top
LOGO17  OSHW_LOGO_FILLX0100-NT  [OSHW_FILLX100_NOTEXT]  170.92,13.39 0 top
LOGO18  OSHW_LOGO_FILLX0100-NT  [OSHW_FILLX100_NOTEXT]  208.25,13.39 0 top
LOGO19  OSHW_LOGO_FILLX0100-NT  [OSHW_FILLX100_NOTEXT]  245.59,13.39 0 top
LOGO20  OSHW_LOGO_FILLX0100-NT  [OSHW_FILLX100_NOTEXT]  282.93,13.39 0 top
LOGO21  OSHW_LOGO_FILLX0100-NT  [OSHW_FILLX100_NOTEXT]  170.92,44.37 0 top
LOGO22  OSHW_LOGO_FILLX0100-NT  [OSHW_FILLX100_NOTEXT]  208.25,44.37 0 top
LOGO23  OSHW_LOGO_FILLX0100-NT  [OSHW_FILLX100_NOTEXT]  245.59,44.37 0 top
LOGO24  OSHW_LOGO_FILLX0100-NT  [OSHW_FILLX100_NOTEXT]  282.93,44.37 0 top
LOGO25  OSHW_LOGO_FILLX0100-NT  [OSHW_FILLX100_NOTEXT]  170.92,75.36 0 top
LOGO26  OSHW_LOGO_FILLX0100-NT  [OSHW_FILLX100_NOTEXT]  208.25,75.36 0 top
LOGO27  OSHW_LOGO_FILLX0100-NT  [OSHW_FILLX100_NOTEXT]  245.59,75.36 0 top
LOGO28  OSHW_LOGO_FILLX0100-NT  [OSHW_FILLX100_NOTEXT]  282.93,75.36 0 top
LOGO29  OSHW_LOGO_FILLX0100-NT  [OSHW_FILLX100_NOTEXT]  170.92,106.35 0 top
LOGO30  OSHW_LOGO_FILLX0100-NT  [OSHW_FILLX100_NOTEXT]  208.25,106.35 0 top
LOGO31  OSHW_LOGO_FILLX0100-NT  [OSHW_FILLX100_NOTEXT]  245.59,106.35 0 top
LOGO32  OSHW_LOGO_FILLX0100-NT  [OSHW_FILLX100_NOTEXT]  282.93,106.35 0 top
PWR_LED  YELLOW  [LED-0603]  39.27,15.77 0 top
PWR_LED1  YELLOW  [LED-0603]  76.61,15.77 0 top
PWR_LED2  YELLOW  [LED-0603]  113.94,15.77 0 top
PWR_LED3  YELLOW  [LED-0603]  151.28,15.77 0 top
PWR_LED4  YELLOW  [LED-0603]  39.27,46.76 0 top
PWR_LED5  YELLOW  [LED-0603]  76.61,46.76 0 top
PWR_LED6  YELLOW  [LED-0603]  113.94,46.76 0 top
PWR_LED7  YELLOW  [LED-0603]  151.28,46.76 0 top
PWR_LED8  YELLOW  [LED-0603]  39.27,77.75 0 top
PWR_LED9  YELLOW  [LED-0603]  76.61,77.75 0 top
PWR_LED10  YELLOW  [LED-0603]  113.94,77.75 0 top
PWR_LED11  YELLOW  [LED-0603]  151.28,77.75 0 top
PWR_LED12  YELLOW  [LED-0603]  39.27,108.74 0 top
PWR_LED13  YELLOW  [LED-0603]  76.61,108.74 0 top
PWR_LED14  YELLOW  [LED-0603]  113.94,108.74 0 top
PWR_LED15  YELLOW  [LED-0603]  151.28,108.74 0 top
PWR_LED16  YELLOW  [LED-0603]  202.34,15.77 0 top
PWR_LED17  YELLOW  [LED-0603]  239.67,15.77 0 top
PWR_LED18  YELLOW  [LED-0603]  277.01,15.77 0 top
PWR_LED19  YELLOW  [LED-0603]  314.35,15.77 0 top
PWR_LED20  YELLOW  [LED-0603]  202.34,46.76 0 top
PWR_LED21  YELLOW  [LED-0603]  239.67,46.76 0 top
PWR_LED22  YELLOW  [LED-0603]  277.01,46.76 0 top
PWR_LED23  YELLOW  [LED-0603]  314.35,46.76 0 top
PWR_LED24  YELLOW  [LED-0603]  202.34,77.75 0 top
PWR_LED25  YELLOW  [LED-0603]  239.67,77.75 0 top
PWR_LED26  YELLOW  [LED-0603]  277.01,77.75 0 top
PWR_LED27  YELLOW  [LED-0603]  314.35,77.75 0 top
PWR_LED28  YELLOW  [LED-0603]  202.34,108.74 0 top
PWR_LED29  YELLOW  [LED-0603]  239.67,108.74 0 top
PWR_LED30  YELLOW  [LED-0603]  277.01,108.74 0 top
PWR_LED31  YELLOW  [LED-0603]  314.35,108.74 0 top
R1  20K  [0603-RES]  14.48,15.88 90 top
R2  20K  [0603-RES]  17.02,15.88 90 top
R3  20K  [0603-RES]  19.68,15.88 90 top
R4  20K  [0603-RES]  26.8,15.88 90 top
R5  20K  [0603-RES]  22.1,15.88 90 top
R6  390  [0603-RES]  11.94,29.72 0 top
R7  330  [0603-RES]  8.64,29.72 0 top
R8  240  [0603-RES]  14.35,32.13 90 top
R9  1K  [0603-RES]  37.72,15.88 90 top
R10  20K  [0603-RES]  16.56,23.9 180 top
R11  20K  [0603-RES]  34.16,15.88 90 top
R12  20K  [0603-RES]  30.48,15.88 90 top
R13  8.2K  [0603-RES]  30.73,19.43 90 top
R14  1K  [0603-RES]  35.94,15.88 90 top
R15  1K  [0603-RES]  32.38,15.88 90 top
R16  10K  [TRIMPOT-3MM-2]  33.91,19.81 270 top
R17  390  [0603-RES]  49.28,29.72 0 top